# Altium PCB ScoreLED.PcbDoc (part 1 of 4)
Units mil, origin at the board's own origin, x right, y up, seen from the top; angles counter-clockwise.
Board outline 15000 x 7000 mil, 4 copper layers (Top Layer, Ground, Power, Bottom Layer); 605 components, 525 nets, 1780 pads, 554 vias.
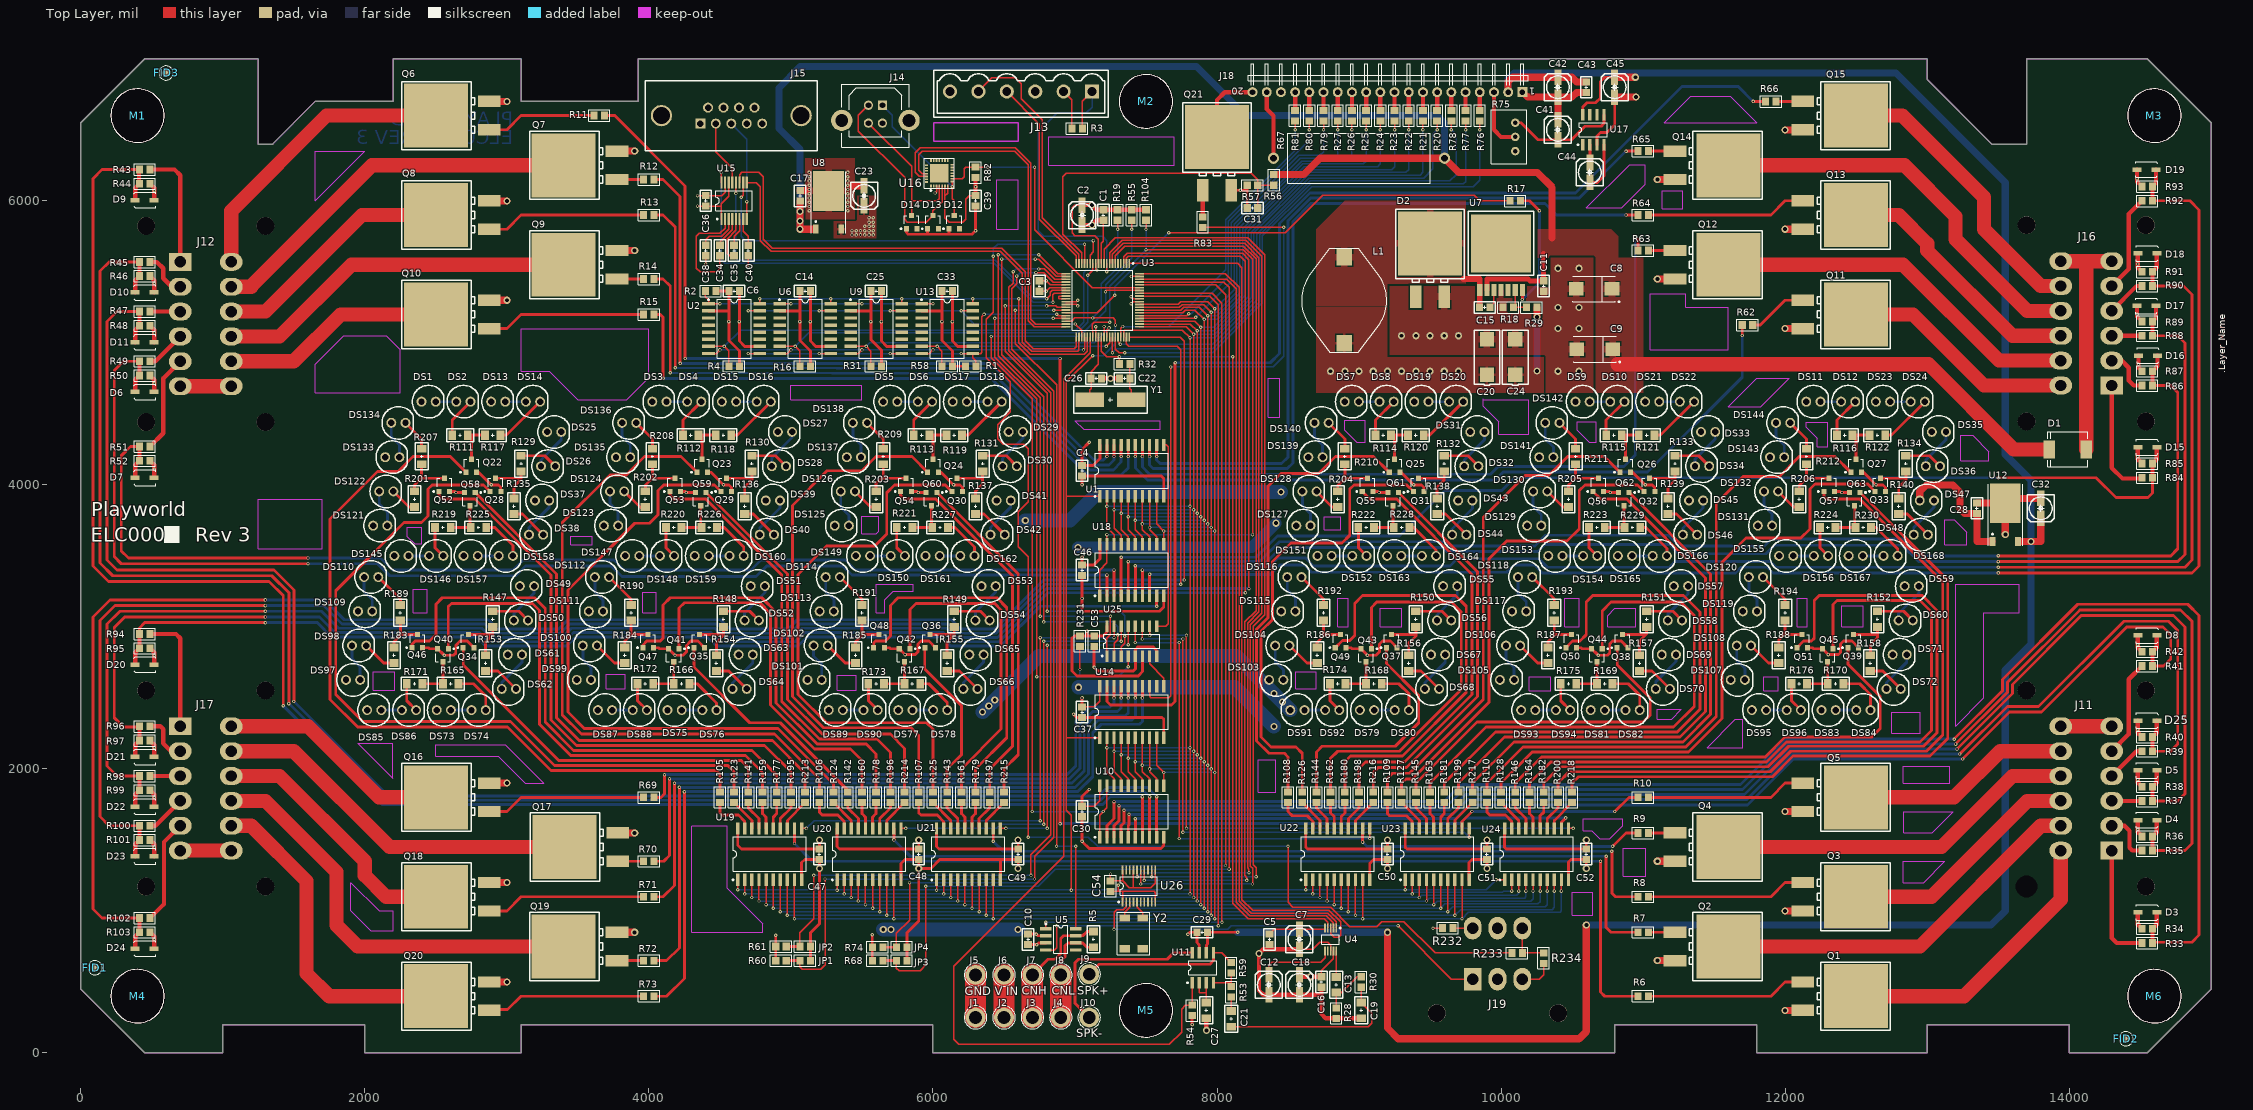
[diagram p0: Top Layer view]
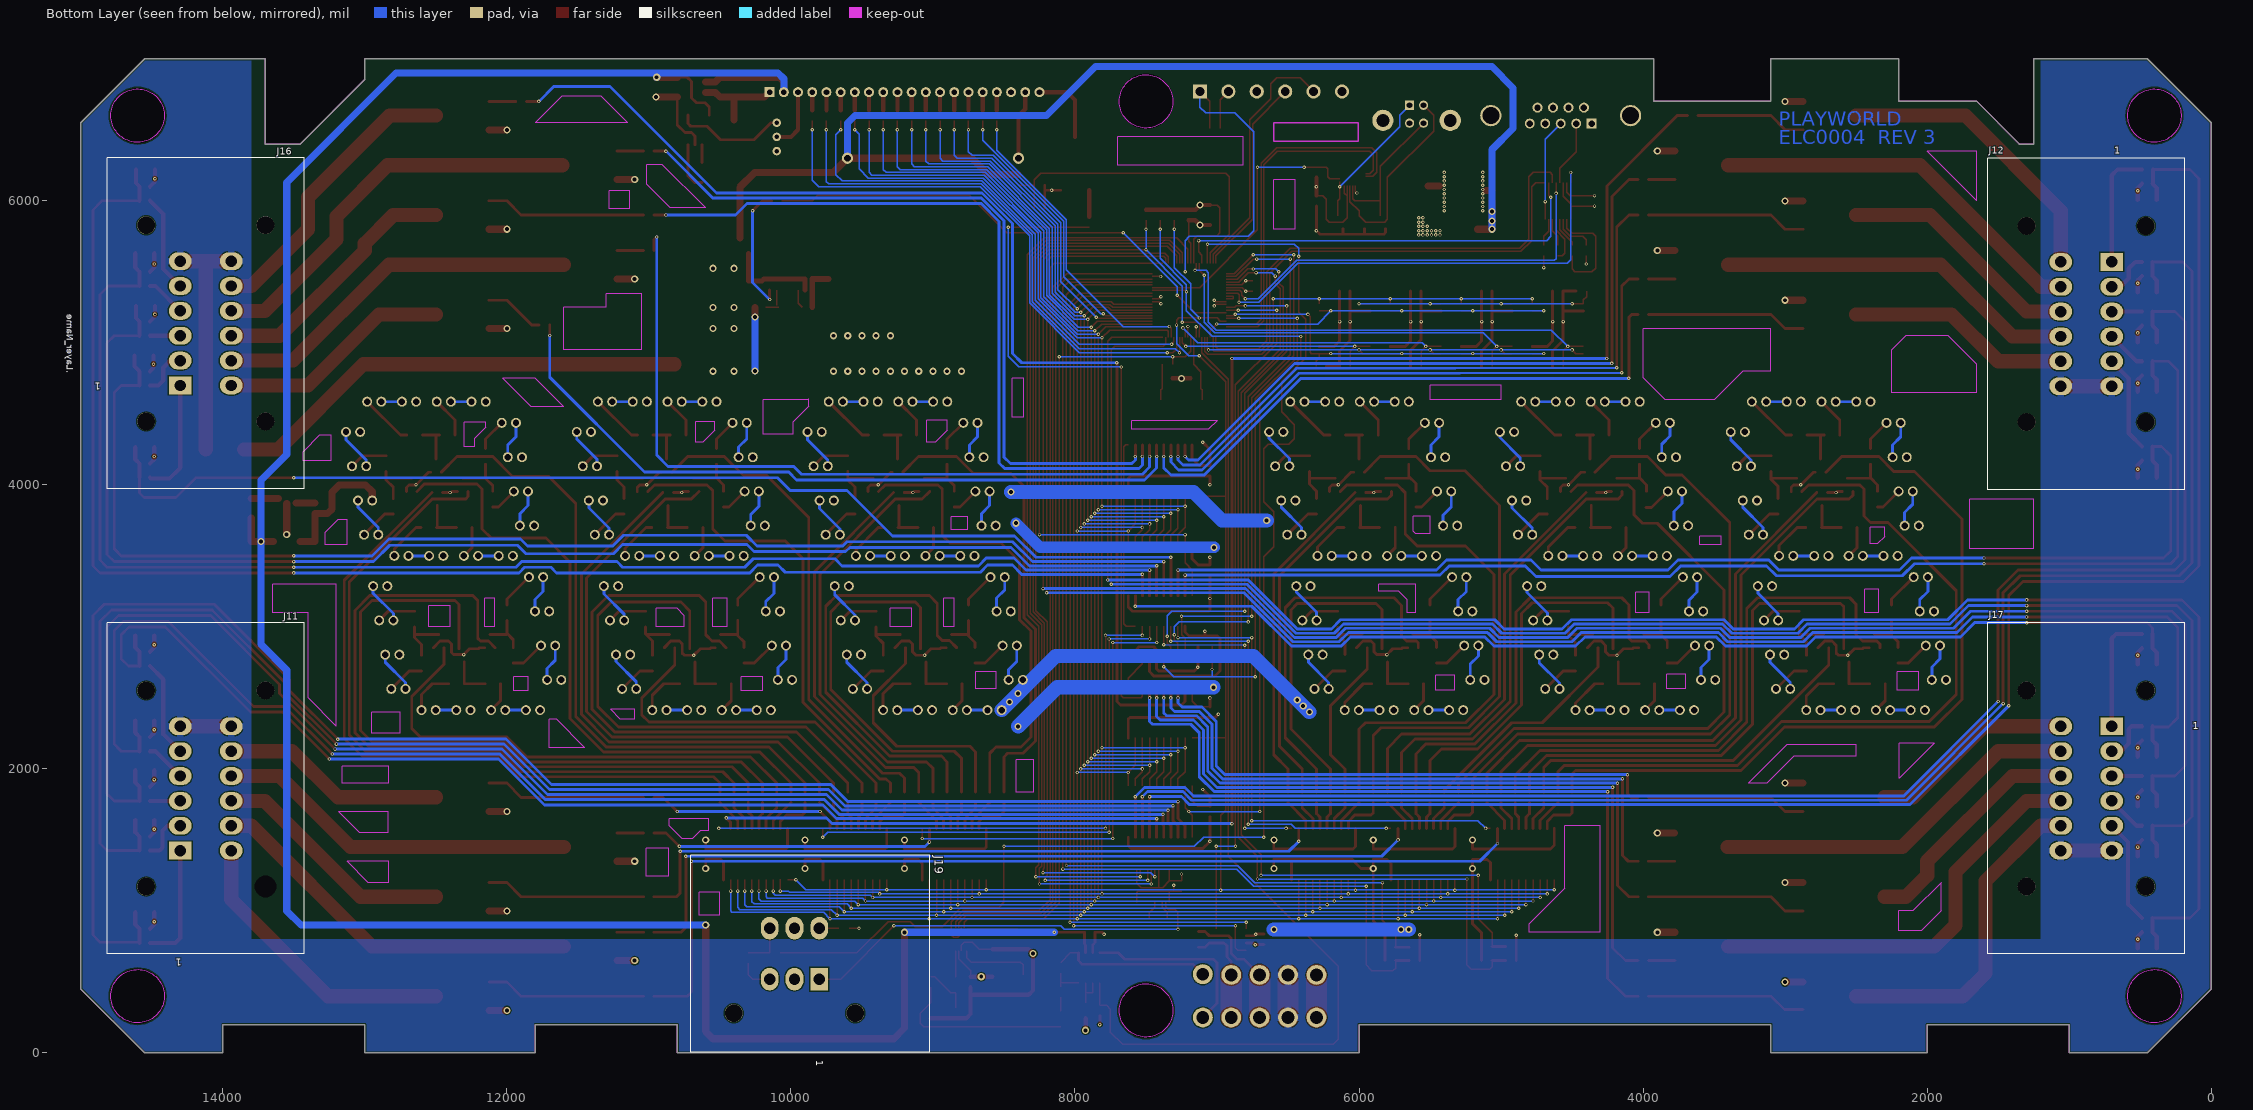
[diagram p1: Bottom Layer view, seen from below]
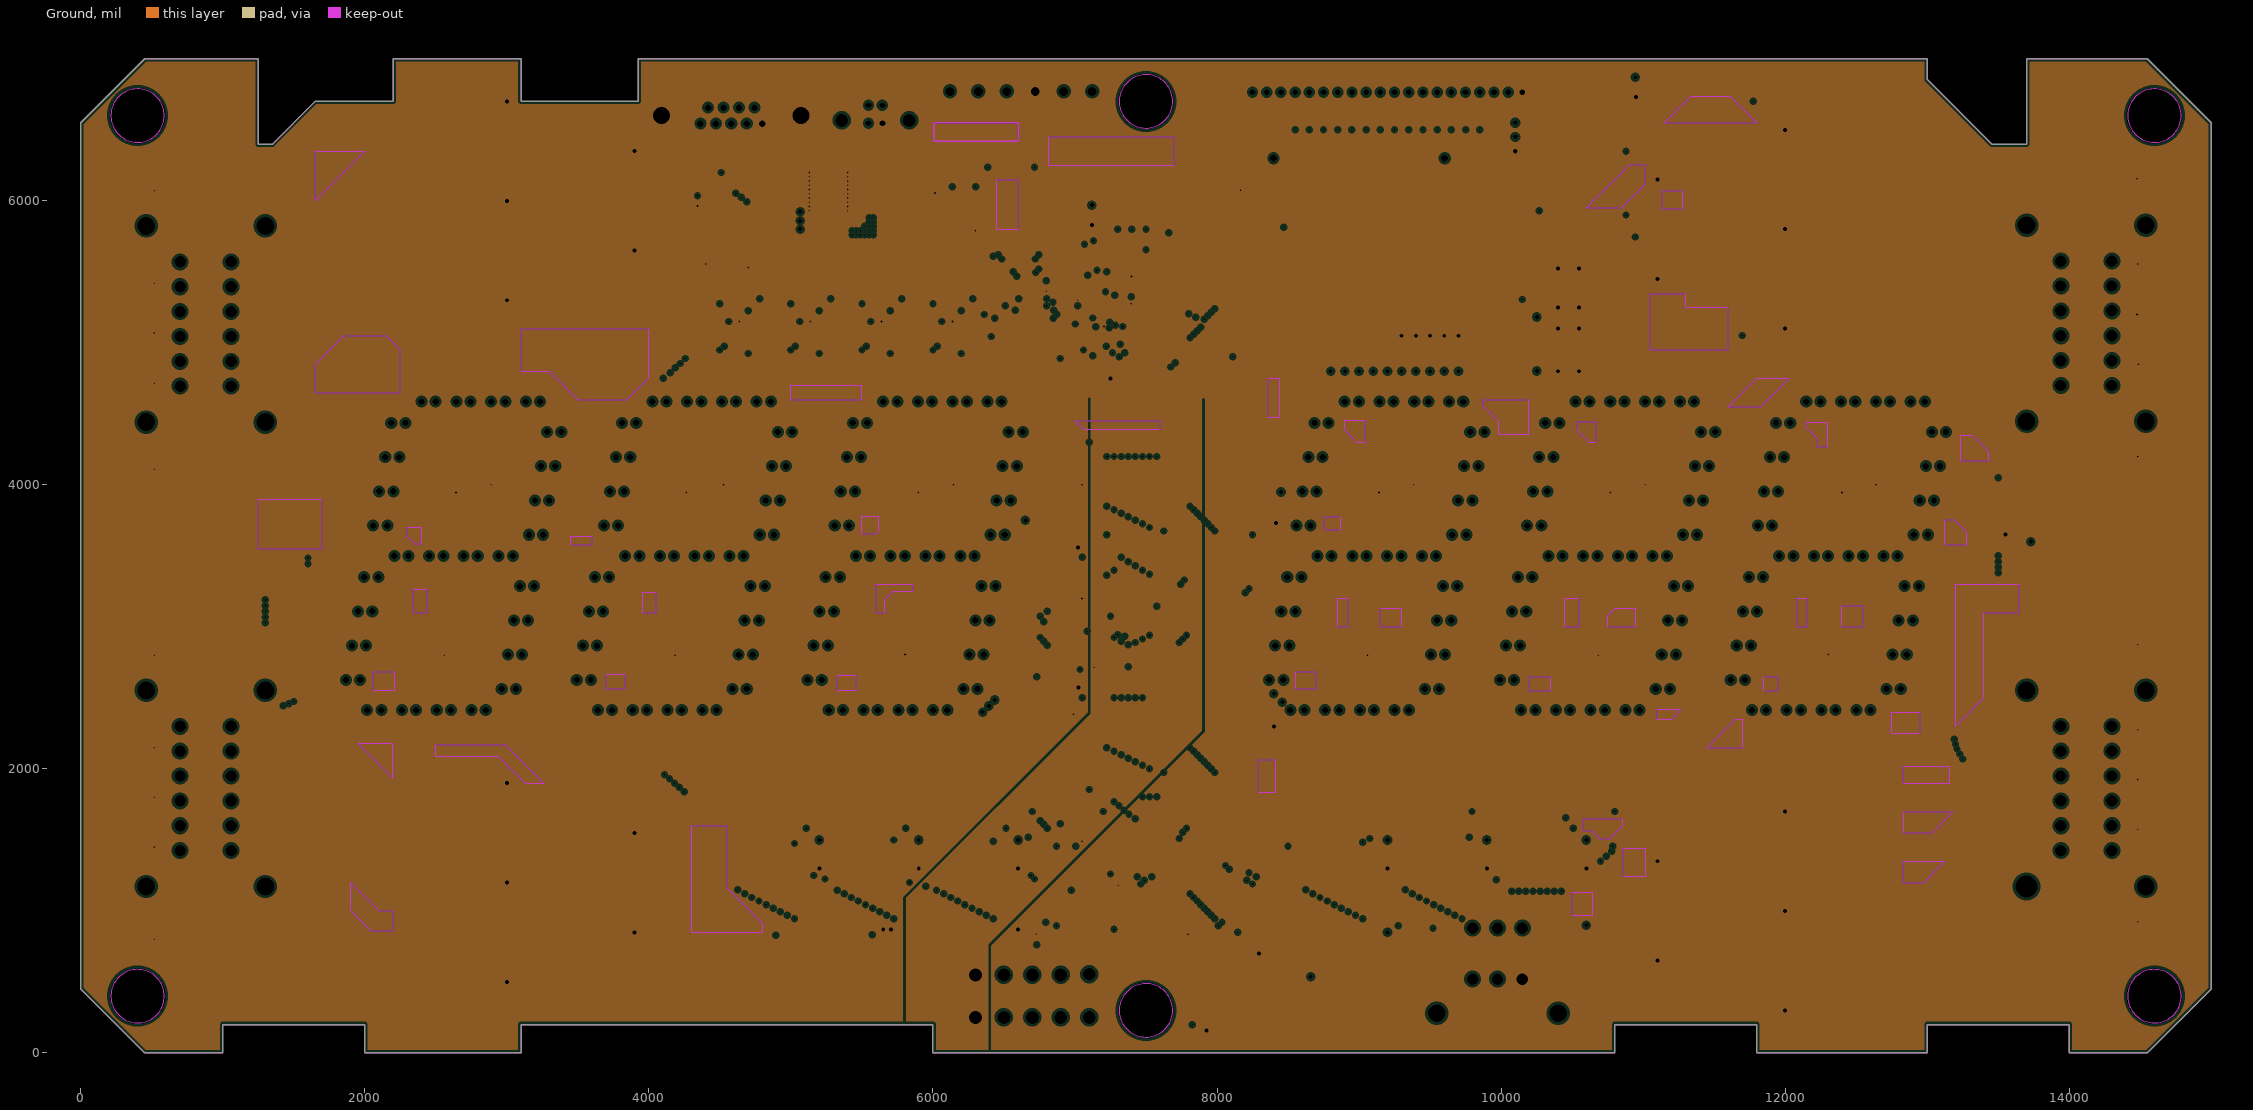
[diagram p2: Ground, clearances drawn from the general rule]
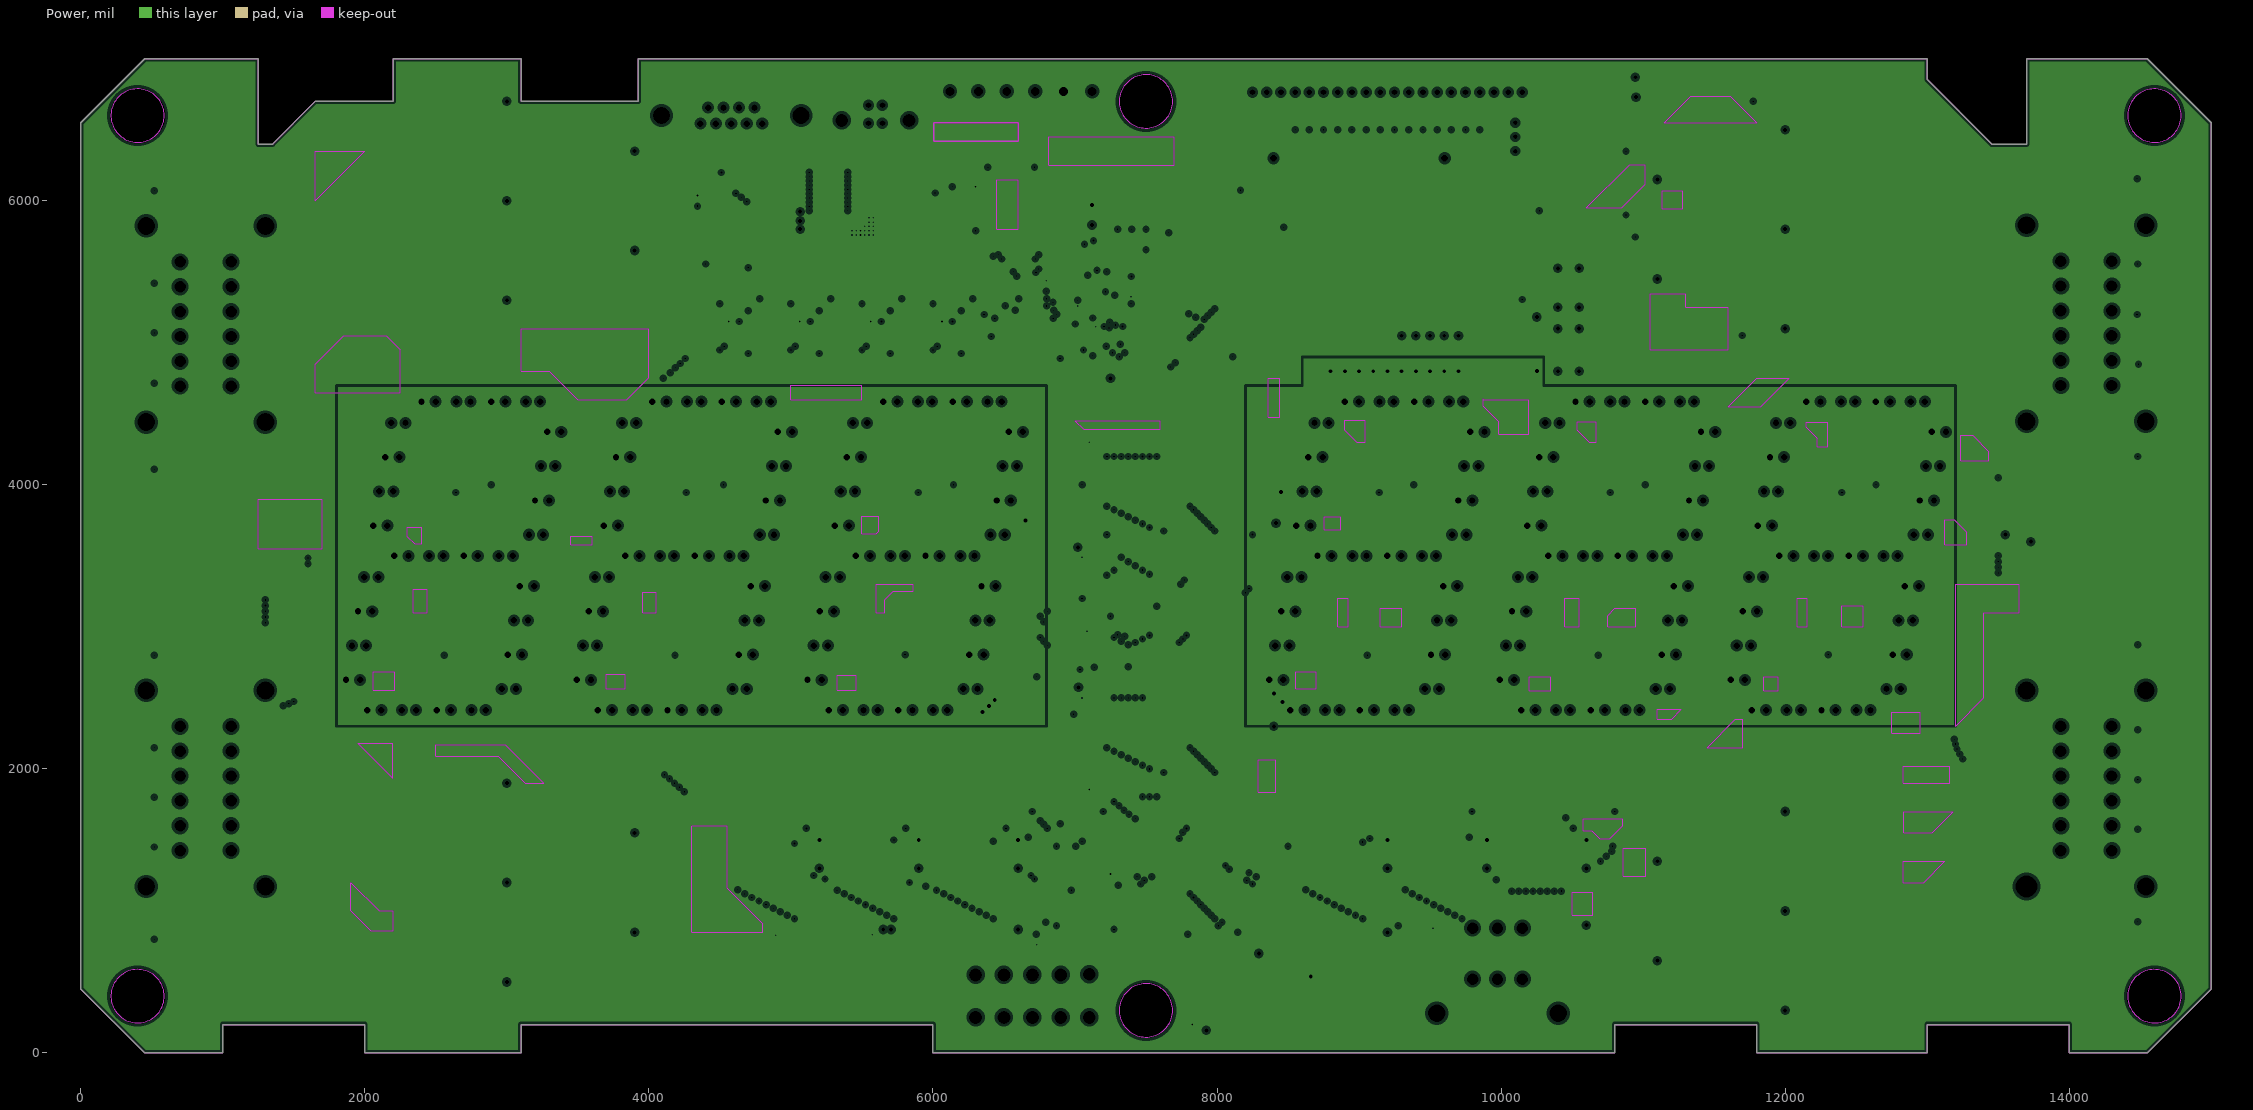
[diagram p3: Power, clearances drawn from the general rule]

## Layer stack, top to bottom
Top Layer: signal copper 1.4
Dielectric: core 12.6, FR-4, Dk 4.8
Ground: plane copper 1.4, net GND
Dielectric: prepreg 12.6, FR-4, Dk 4.8
Power: plane copper 1.4, net (Multiple Nets)
Dielectric: core 12.6, FR-4, Dk 4.8
Bottom Layer: signal copper 1.4

## Board outline
450,0 1000,0 1000,200 2000,200 2000,0 3100,0 3100,200 6000,200 6000,0 10800,0 10800,200 11800,200 11800,0 13000,0 13000,200 14000,200 14000,0 14550,0 15000,450 15000,6550 14550,7000 13700,7000 13700,6400 13455,6400 13000,6855 13000,7000 3925,7000 3925,6700 3100,6700 3100,7000 2200,7000 2200,6700 1650,6700 1350,6400 1250,6400 1250,7000 450,7000 0,6550 0,450

## Design rules (kind name [scope] priority, off if disabled: settings)
Clearance Clearance_Poly_Gnd [(InPolygon AND InNet('GND')) vs Not InNet('GND')] p1: gap=15
Clearance Clearance_MicroPads [(HasFootprint('TQFP-80')) Or (HasFootprint('TSSOP\10'))] p2: gap=5
Clearance [All] p3: gap=8
ComponentClearance ComponentClearance_LEDs [(HasFootprint('LED T1-3/4 FLUSH')) vs (HasFootprint('LED T1-3/4 FLUSH'))] p1: gap=0 collisioncheckmode=2 verticalgap=0
ComponentClearance [All] p2: gap=5 collisioncheckmode=2 verticalgap=10
Height [All] p1: minheight=0 maxheight=1200 prefheight=500
HoleSize HoleSize_DSUB [HasFootprint('DSUBV9')] p1: absolutevalues=TRUE maxlimit=120 minlimit=45 maxpercent=80.000 minpercent=20.000
HoleSize HoleSize_Deutsch [HasFootprint('JDT1512PA00Z') or HasFootprint('JDT1506PA00Z - 2 holes')] p2: absolutevalues=TRUE maxlimit=125 minlimit=80 maxpercent=80.000 minpercent=20.000
HoleSize HoleSize_Mount [HasFootprint('MHole250')] p3: absolutevalues=TRUE maxlimit=250 minlimit=100 maxpercent=80.000 minpercent=20.000
HoleSize [All] p4: absolutevalues=TRUE maxlimit=100 minlimit=0 maxpercent=80.000 minpercent=20.000
PlaneClearance PlaneClearance_Mounting [HasFootprint('MHole250')] p1: clearance=100
PlaneClearance [All] p2: clearance=20
PlaneConnect [All] p1: planeconnectstyle=Relief reliefexpansion=20 reliefentries=4 reliefconductorwidth=10 reliefairgap=10
PolygonConnect PolygonConnect_Vias [IsVia] p1: connectstyle=Direct reliefconductorwidth=50 reliefentries=4 polygonreliefangle="90 Angle"
PolygonConnect PolygonConnect_Vbat [InNet('VBAT') OR
InNet('NetC15_2') OR
InNet('+8 VCD') OR
InNet('GND') OR
InNet('Vin')] p2: connectstyle=Relief reliefconductorwidth=50 reliefentries=4 polygonreliefangle="90 Angle"
PolygonConnect [All] p3: connectstyle=Relief reliefconductorwidth=20 reliefentries=4 polygonreliefangle="90 Angle"
RoutingVias [All] p1: holewidth=28 width=50 viastyle="Through Hole" minholewidth=12 minwidth=24 maxholewidth=28 maxwidth=50
ShortCircuit Short_QFN28 [HasFootprintPad( 'QFN-P28','*')] p1: allowed=TRUE
ShortCircuit ShortCircuit_VDD_VCC [(InNet('VCC')) vs InNet('VDD')] p2: allowed=TRUE
ShortCircuit [All] p3: allowed=FALSE
SolderMaskExpansion [All] p1: expansion=4
TestPointUsage [All] p1: valid=0 allowmultiple=FALSE
Testpoint [All] p1: side=15 testpointundercomponent=TRUE minsize=40 maxsize=100 preferedsize=60 minholesize=0 maxholesize=40 preferedholesize=32 testpointgrid=1 style=1023 order=0123456789
Width Width_LAMP [InNetClass('Class_Lamp')] p1: maxlimit=150 minlimit=80 preferedwidth=100
Width Width_Can [(InNet('NetJ3_1') or InNet('NetJ4_1'))] p2: maxlimit=150 minlimit=10 preferedwidth=10
Width Width_Power [InNetClass('Class_Power')] p3: maxlimit=150 minlimit=10 preferedwidth=40
Width [All] p4: maxlimit=40 minlimit=10 preferedwidth=10 minimp=50.000000 maximp=50.000000 favimp=50.000000
13 further rules are at their usual default settings.

## Classes and differential pairs
net class Class_Power: "+3.3 VDC" "+5 VDC" "+8 VDC" GND VBAT VIN
net class Class_Lamp: NetJ11_8 NetJ11_9 NetJ11_10 NetJ11_11 NetJ11_12 NetJ12_8 NetJ12_9 NetJ12_10 NetJ12_11 NetJ12_12 NetJ16_8 NetJ16_9 NetJ16_10 NetJ16_11 NetJ16_12 NetJ17_8 NetJ17_9 NetJ17_10 NetJ17_11 NetJ17_12 VBAT

## Components (designator, comment, footprint, x,y, rotation, side; value= is the part's Value field where it differs from the comment)
C1 "0.1 uF 50 V" C0805 7200,5900 r270 top
C2 "10uF 16V" C4X5.8 7050,5900 r0 top
C3 "0.1 uF 50 V" C0805 6750,5400 r270 top
C4 "0.1 uF 50 V" C0805 7050,4100 r270 top
C5 "0.1 uF 50 V" C0805 8370,800 r270 top
C6 "0.1 uF 50 V" C0805 4600,5365 r0 top
C7 "10uF 16V" C4X5.8 8580,800 r0 top
C8 "47uF 35V" "C EIA7343-43 (X)" 10655,5380 r180 top
C9 "47uF 35V" "C EIA7343-43 (X)" 10660,4955 r180 top
C10 "0.1 uF 50 V" C0805 6670,800 r90 top
C11 "0.1 uF 50 V" C0805 10300,5400 r270 top
C12 "10uF 16V" C4X5.8 8365,480 r0 top
C13 "1uF 25V" R1206 8840,480 r270 top
C14 "0.1 uF 50 V" C0805 5100,5365 r0 top
C15 "CS/C0805C103K5RAC" C0805 9885,5250 r180 top
C16 "0.1 uF 50 V" C0805 8735,500 r270 top
C17 "0.1 uF 50 V" C0805 5065,6035 r90 top
C18 "10uF 16V" C4X5.8 8580,480 r0 top
C19 "1uF 25V" R1206 9015,300 r270 top
C20 "68uF 16V" C7343 9900,4900 r90 top
C21 ".33uF 25V" R1206 8100,240 r90 top
C22 "18pF" C0805 7350,4750 r180 top
C23 "10uF 16V" C4X5.8 5515,6035 r180 top
C24 "68uF 16V" C7343 10100,4900 r90 top
C25 "0.1 uF 50 V" C0805 5600,5365 r0 top
C26 "18pF" C0805 7150,4750 r0 top
C27 "1uF 25V" R1206 7925,300 r270 top
C28 "0.1 uF 50 V" C0805 13350,3835 r90 top
C29 "0.1 uF 50 V" C0805 7895,850 r180 top
C30 "0.1 uF 50 V" C0805 7050,1700 r270 top
C31 "0.1 uF 50 V" C0805 8250,5950 r180 top
C32 "10uF 16V" C4X5.8 13800,3835 r180 top
C33 "0.1 uF 50 V" C0805 6100,5365 r0 top
C34 "0.1 uF 50 V" C0805 4500,5650 r90 top
C35 "0.1 uF 50 V" C0805 4600,5650 r90 top
C36 "0.1 uF 50 V" C0805 4400,6000 r270 top
C37 "0.1 uF 50 V" C0805 7050,2400 r270 top
C38 "0.1 uF 50 V" C0805 4400,5650 r270 top
C39 "0.1 uF 50 V" C0805 6300,6000 r270 top
C40 "0.1 uF 50 V" C0805 4700,5650 r270 top
C41 "10uF 16V" C4X5.8 10400,6500 r0 top
C42 "10uF 16V" C4X5.8 10400,6800 r0 top
C43 "0.1 uF 50 V" C0805 10600,6800 r270 top
C44 "10uF 16V" C4X5.8 10625,6200 r0 top
C45 "10uF 16V" C4X5.8 10800,6800 r0 top
C46 "0.1 uF 50 V" C0805 7050,3400 r270 top
C47 "0.1 uF 50 V" C0805 5200,1400 r270 top
C48 "0.1 uF 50 V" C0805 5900,1400 r270 top
C49 "0.1 uF 50 V" C0805 6600,1400 r270 top
C50 "0.1 uF 50 V" C0805 9200,1400 r270 top
C51 "0.1 uF 50 V" C0805 9900,1400 r270 top
C52 "0.1 uF 50 V" C0805 10600,1400 r270 top
C53 "0.1 uF 50 V" C0805 7135,2900 r270 top
C54 "0.1 uF 50 V" C0805 7250,1175 r270 top
D1 "3A 600V SMC" DIODE_SMC 13990,4250 r180 top
D2 "8A 80V" D2PAK 9500,5700 r0 top
D3 "3.0V 500mW" SOD123 14550,990 r0 top
D4 "3.0V 500mW" SOD123 14550,1640 r0 top
D5 "3.0V 500mW" SOD123 14550,1990 r0 top
D6 "3.0V 500mW" SOD123 450,4655 r180 top
D7 "3.0V 500mW" SOD123 450,4050 r180 top
D8 "3.0V 500mW" SOD123 14550,2940 r0 top
D9 "3.0V 500mW" SOD123 450,6005 r180 top
D10 "3.0V 500mW" SOD123 450,5355 r180 top
D11 "3.0V 500mW" SOD123 450,5005 r180 top
D12 "BAS16" SOT23 6150,5850 r0 top
D13 "BAS16" SOT23 6000,5850 r0 top
D14 "BAS16" SOT23 5850,5850 r0 top
D15 "3.0V 500mW" SOD123 14550,4265 r0 top
D16 "3.0V 500mW" SOD123 14555,4910 r0 top
D17 "3.0V 500mW" SOD123 14545,5260 r0 top
D18 "3.0V 500mW" SOD123 14550,5630 r0 top
D19 "3.0V 500mW" SOD123 14545,6220 r0 top
D20 "3.0V 500mW" SOD123 450,2735 r180 top
D21 "3.0V 500mW" SOD123 450,2085 r180 top
D22 "3.0V 500mW" SOD123 450,1735 r180 top
D23 "3.0V 500mW" SOD123 450,1385 r180 top
D24 "3.0V 500mW" SOD123 450,735 r180 top
D25 "3.0V 500mW" SOD123 14550,2340 r0 top
DS1 "RED T1-3/4" "LED T1-3/4 Flush" 2398.9,4585.8 r0 top locked
DS2 "RED T1-3/4" "LED T1-3/4 Flush" 2643.9,4585.8 r0 top locked
DS3 "RED T1-3/4" "LED T1-3/4 Flush" 4023.9,4585.8 r0 top locked
DS4 "RED T1-3/4" "LED T1-3/4 Flush" 4268.9,4585.8 r0 top locked
DS5 "RED T1-3/4" "LED T1-3/4 Flush" 5648.9,4585.8 r0 top locked
DS6 "RED T1-3/4" "LED T1-3/4 Flush" 5893.9,4585.8 r0 top locked
DS7 "GREEN T1-3/4" "LED T1-3/4 Flush" 8898.9,4585.8 r0 top locked
DS8 "GREEN T1-3/4" "LED T1-3/4 Flush" 9143.9,4585.8 r0 top locked
DS9 "GREEN T1-3/4" "LED T1-3/4 Flush" 10523.9,4585.8 r0 top locked
DS10 "GREEN T1-3/4" "LED T1-3/4 Flush" 10768.9,4585.8 r0 top locked
DS11 "GREEN T1-3/4" "LED T1-3/4 Flush" 12148.9,4585.8 r0 top locked
DS12 "GREEN T1-3/4" "LED T1-3/4 Flush" 12393.9,4585.8 r0 top locked
DS13 "RED T1-3/4" "LED T1-3/4 Flush" 2888.9,4585.8 r0 top locked
DS14 "RED T1-3/4" "LED T1-3/4 Flush" 3133.9,4585.8 r0 top locked
DS15 "RED T1-3/4" "LED T1-3/4 Flush" 4513.9,4585.8 r0 top locked
DS16 "RED T1-3/4" "LED T1-3/4 Flush" 4758.9,4585.8 r0 top locked
DS17 "RED T1-3/4" "LED T1-3/4 Flush" 6138.9,4585.8 r0 top locked
DS18 "RED T1-3/4" "LED T1-3/4 Flush" 6383.9,4585.8 r0 top locked
DS19 "GREEN T1-3/4" "LED T1-3/4 Flush" 9388.9,4585.8 r0 top locked
DS20 "GREEN T1-3/4" "LED T1-3/4 Flush" 9633.9,4585.8 r0 top locked
DS21 "GREEN T1-3/4" "LED T1-3/4 Flush" 11013.9,4585.8 r0 top locked
DS22 "GREEN T1-3/4" "LED T1-3/4 Flush" 11258.9,4585.8 r0 top locked
DS23 "GREEN T1-3/4" "LED T1-3/4 Flush" 12638.9,4585.8 r0 top locked
DS24 "GREEN T1-3/4" "LED T1-3/4 Flush" 12883.9,4585.8 r0 top locked
DS25 "RED T1-3/4" "LED T1-3/4 Flush" 3283,4372.9 r0 top locked
DS26 "RED T1-3/4" "LED T1-3/4 Flush" 3240.5,4131.6 r0 top locked
DS27 "RED T1-3/4" "LED T1-3/4 Flush" 4908,4372.9 r0 top locked
DS28 "RED T1-3/4" "LED T1-3/4 Flush" 4865.5,4131.6 r0 top locked
DS29 "RED T1-3/4" "LED T1-3/4 Flush" 6533,4372.9 r0 top locked
DS30 "RED T1-3/4" "LED T1-3/4 Flush" 6490.5,4131.6 r0 top locked
DS31 "GREEN T1-3/4" "LED T1-3/4 Flush" 9783,4372.9 r0 top locked
DS32 "GREEN T1-3/4" "LED T1-3/4 Flush" 9740.5,4131.6 r0 top locked
DS33 "GREEN T1-3/4" "LED T1-3/4 Flush" 11408,4372.9 r0 top locked
DS34 "GREEN T1-3/4" "LED T1-3/4 Flush" 11365.5,4131.6 r0 top locked
DS35 "GREEN T1-3/4" "LED T1-3/4 Flush" 13033,4372.9 r0 top locked
DS36 "GREEN T1-3/4" "LED T1-3/4 Flush" 12990.5,4131.6 r0 top locked
DS37 "RED T1-3/4" "LED T1-3/4 Flush" 3197.9,3890.3 r0 top locked
DS38 "RED T1-3/4" "LED T1-3/4 Flush" 3155.4,3649.1 r0 top locked
DS39 "RED T1-3/4" "LED T1-3/4 Flush" 4822.9,3890.3 r0 top locked
DS40 "RED T1-3/4" "LED T1-3/4 Flush" 4780.4,3649.1 r0 top locked
DS41 "RED T1-3/4" "LED T1-3/4 Flush" 6447.9,3890.3 r0 top locked
DS42 "RED T1-3/4" "LED T1-3/4 Flush" 6405.4,3649.1 r0 top locked
DS43 "GREEN T1-3/4" "LED T1-3/4 Flush" 9697.9,3890.3 r0 top locked
DS44 "GREEN T1-3/4" "LED T1-3/4 Flush" 9655.4,3649.1 r0 top locked
DS45 "GREEN T1-3/4" "LED T1-3/4 Flush" 11322.9,3890.3 r0 top locked
DS46 "GREEN T1-3/4" "LED T1-3/4 Flush" 11280.4,3649.1 r0 top locked
DS47 "GREEN T1-3/4" "LED T1-3/4 Flush" 12947.9,3890.3 r0 top locked
DS48 "GREEN T1-3/4" "LED T1-3/4 Flush" 12905.4,3649.1 r0 top locked
DS49 "RED T1-3/4" "LED T1-3/4 Flush" 3091.6,3287.1 r0 top locked
DS50 "RED T1-3/4" "LED T1-3/4 Flush" 3049,3045.9 r0 top locked
DS51 "RED T1-3/4" "LED T1-3/4 Flush" 4716.6,3287.1 r0 top locked
DS52 "RED T1-3/4" "LED T1-3/4 Flush" 4674,3045.9 r0 top locked
DS53 "RED T1-3/4" "LED T1-3/4 Flush" 6341.6,3287.1 r0 top locked
DS54 "RED T1-3/4" "LED T1-3/4 Flush" 6299,3045.9 r0 top locked
DS55 "GREEN T1-3/4" "LED T1-3/4 Flush" 9591.6,3287.1 r0 top locked
DS56 "GREEN T1-3/4" "LED T1-3/4 Flush" 9549,3045.9 r0 top locked
DS57 "GREEN T1-3/4" "LED T1-3/4 Flush" 11216.6,3287.1 r0 top locked
DS58 "GREEN T1-3/4" "LED T1-3/4 Flush" 11174,3045.9 r0 top locked
DS59 "GREEN T1-3/4" "LED T1-3/4 Flush" 12841.6,3287.1 r0 top locked
DS60 "GREEN T1-3/4" "LED T1-3/4 Flush" 12799,3045.9 r0 top locked
DS61 "RED T1-3/4" "LED T1-3/4 Flush" 3006.5,2804.6 r0 top locked
DS62 "RED T1-3/4" "LED T1-3/4 Flush" 2963.9,2563.3 r0 top locked
DS63 "RED T1-3/4" "LED T1-3/4 Flush" 4631.5,2804.6 r0 top locked
DS64 "RED T1-3/4" "LED T1-3/4 Flush" 4588.9,2563.3 r0 top locked
DS65 "RED T1-3/4" "LED T1-3/4 Flush" 6256.5,2804.6 r0 top locked
DS66 "RED T1-3/4" "LED T1-3/4 Flush" 6213.9,2563.3 r0 top locked
DS67 "GREEN T1-3/4" "LED T1-3/4 Flush" 9506.5,2804.6 r0 top locked
DS68 "GREEN T1-3/4" "LED T1-3/4 Flush" 9463.9,2563.3 r0 top locked
DS69 "GREEN T1-3/4" "LED T1-3/4 Flush" 11131.5,2804.6 r0 top locked
DS70 "GREEN T1-3/4" "LED T1-3/4 Flush" 11088.9,2563.3 r0 top locked
DS71 "GREEN T1-3/4" "LED T1-3/4 Flush" 12756.5,2804.6 r0 top locked
DS72 "GREEN T1-3/4" "LED T1-3/4 Flush" 12713.9,2563.3 r0 top locked
DS73 "RED T1-3/4" "LED T1-3/4 Flush" 2506.1,2414.2 r0 top locked
DS74 "RED T1-3/4" "LED T1-3/4 Flush" 2751.1,2414.2 r0 top locked
DS75 "RED T1-3/4" "LED T1-3/4 Flush" 4131.1,2414.2 r0 top locked
DS76 "RED T1-3/4" "LED T1-3/4 Flush" 4376.1,2414.2 r0 top locked
DS77 "RED T1-3/4" "LED T1-3/4 Flush" 5756.1,2414.2 r0 top locked
DS78 "RED T1-3/4" "LED T1-3/4 Flush" 6001.1,2414.2 r0 top locked
DS79 "GREEN T1-3/4" "LED T1-3/4 Flush" 9006.1,2414.2 r0 top locked
DS80 "GREEN T1-3/4" "LED T1-3/4 Flush" 9251.1,2414.2 r0 top locked
DS81 "GREEN T1-3/4" "LED T1-3/4 Flush" 10631.1,2414.2 r0 top locked
DS82 "GREEN T1-3/4" "LED T1-3/4 Flush" 10876.1,2414.2 r0 top locked
DS83 "GREEN T1-3/4" "LED T1-3/4 Flush" 12256.1,2414.2 r0 top locked
DS84 "GREEN T1-3/4" "LED T1-3/4 Flush" 12501.1,2414.2 r0 top locked
DS85 "RED T1-3/4" "LED T1-3/4 Flush" 2016.1,2414.2 r0 top locked
DS86 "RED T1-3/4" "LED T1-3/4 Flush" 2261.1,2414.2 r0 top locked
DS87 "RED T1-3/4" "LED T1-3/4 Flush" 3641.1,2414.2 r0 top locked
DS88 "RED T1-3/4" "LED T1-3/4 Flush" 3886.1,2414.2 r0 top locked
DS89 "RED T1-3/4" "LED T1-3/4 Flush" 5266.1,2414.2 r0 top locked
DS90 "RED T1-3/4" "LED T1-3/4 Flush" 5511.1,2414.2 r0 top locked
DS91 "GREEN T1-3/4" "LED T1-3/4 Flush" 8516.1,2414.2 r0 top locked
DS92 "GREEN T1-3/4" "LED T1-3/4 Flush" 8761.1,2414.2 r0 top locked
DS93 "GREEN T1-3/4" "LED T1-3/4 Flush" 10141.1,2414.2 r0 top locked
DS94 "GREEN T1-3/4" "LED T1-3/4 Flush" 10386.1,2414.2 r0 top locked
DS95 "GREEN T1-3/4" "LED T1-3/4 Flush" 11766.1,2414.2 r0 top locked
DS96 "GREEN T1-3/4" "LED T1-3/4 Flush" 12011.1,2414.2 r0 top locked
DS97 "RED T1-3/4" "LED T1-3/4 Flush" 1867,2627.1 r0 top locked
DS98 "RED T1-3/4" "LED T1-3/4 Flush" 1909.5,2868.4 r0 top locked
DS99 "RED T1-3/4" "LED T1-3/4 Flush" 3492,2627.1 r0 top locked
DS100 "RED T1-3/4" "LED T1-3/4 Flush" 3534.5,2868.4 r0 top locked
DS101 "RED T1-3/4" "LED T1-3/4 Flush" 5117,2627.1 r0 top locked
DS102 "RED T1-3/4" "LED T1-3/4 Flush" 5159.5,2868.4 r0 top locked
DS103 "GREEN T1-3/4" "LED T1-3/4 Flush" 8367,2627.1 r0 top locked
DS104 "GREEN T1-3/4" "LED T1-3/4 Flush" 8409.5,2868.4 r0 top locked
DS105 "GREEN T1-3/4" "LED T1-3/4 Flush" 9992,2627.1 r0 top locked
DS106 "GREEN T1-3/4" "LED T1-3/4 Flush" 10034.5,2868.4 r0 top locked
DS107 "GREEN T1-3/4" "LED T1-3/4 Flush" 11617,2627.1 r0 top locked
DS108 "GREEN T1-3/4" "LED T1-3/4 Flush" 11659.5,2868.4 r0 top locked
DS109 "RED T1-3/4" "LED T1-3/4 Flush" 1952.1,3109.7 r0 top locked
DS110 "RED T1-3/4" "LED T1-3/4 Flush" 1994.6,3350.9 r0 top locked
DS111 "RED T1-3/4" "LED T1-3/4 Flush" 3577.1,3109.7 r0 top locked
DS112 "RED T1-3/4" "LED T1-3/4 Flush" 3619.6,3350.9 r0 top locked
DS113 "RED T1-3/4" "LED T1-3/4 Flush" 5202.1,3109.7 r0 top locked
DS114 "RED T1-3/4" "LED T1-3/4 Flush" 5244.6,3350.9 r0 top locked
DS115 "GREEN T1-3/4" "LED T1-3/4 Flush" 8452.1,3109.7 r0 top locked
DS116 "GREEN T1-3/4" "LED T1-3/4 Flush" 8494.6,3350.9 r0 top locked
DS117 "GREEN T1-3/4" "LED T1-3/4 Flush" 10077.1,3109.7 r0 top locked
DS118 "GREEN T1-3/4" "LED T1-3/4 Flush" 10119.6,3350.9 r0 top locked
DS119 "GREEN T1-3/4" "LED T1-3/4 Flush" 11702.1,3109.7 r0 top locked
DS120 "GREEN T1-3/4" "LED T1-3/4 Flush" 11744.6,3350.9 r0 top locked
DS121 "RED T1-3/4" "LED T1-3/4 Flush" 2058.4,3712.9 r0 top locked
DS122 "RED T1-3/4" "LED T1-3/4 Flush" 2101,3954.1 r0 top locked
DS123 "RED T1-3/4" "LED T1-3/4 Flush" 3683.4,3712.9 r0 top locked
DS124 "RED T1-3/4" "LED T1-3/4 Flush" 3726,3954.1 r0 top locked
DS125 "RED T1-3/4" "LED T1-3/4 Flush" 5308.4,3712.9 r0 top locked
DS126 "RED T1-3/4" "LED T1-3/4 Flush" 5351,3954.1 r0 top locked
DS127 "GREEN T1-3/4" "LED T1-3/4 Flush" 8558.4,3712.9 r0 top locked
DS128 "GREEN T1-3/4" "LED T1-3/4 Flush" 8601,3954.1 r0 top locked
DS129 "GREEN T1-3/4" "LED T1-3/4 Flush" 10183.4,3712.9 r0 top locked
DS130 "GREEN T1-3/4" "LED T1-3/4 Flush" 10226,3954.1 r0 top locked
DS131 "GREEN T1-3/4" "LED T1-3/4 Flush" 11808.4,3712.9 r0 top locked
DS132 "GREEN T1-3/4" "LED T1-3/4 Flush" 11851,3954.1 r0 top locked
DS133 "RED T1-3/4" "LED T1-3/4 Flush" 2143.5,4195 r0 top locked
DS134 "RED T1-3/4" "LED T1-3/4 Flush" 2186.1,4436.7 r0 top locked
DS135 "RED T1-3/4" "LED T1-3/4 Flush" 3768.5,4195 r0 top locked
DS136 "RED T1-3/4" "LED T1-3/4 Flush" 3811.1,4436.7 r0 top locked
DS137 "RED T1-3/4" "LED T1-3/4 Flush" 5393.5,4195 r0 top locked
DS138 "RED T1-3/4" "LED T1-3/4 Flush" 5436.1,4436.7 r0 top locked
DS139 "GREEN T1-3/4" "LED T1-3/4 Flush" 8643.5,4195 r0 top locked
DS140 "GREEN T1-3/4" "LED T1-3/4 Flush" 8686.1,4436.7 r0 top locked
DS141 "GREEN T1-3/4" "LED T1-3/4 Flush" 10268.5,4195 r0 top locked
DS142 "GREEN T1-3/4" "LED T1-3/4 Flush" 10311.1,4436.7 r0 top locked
DS143 "GREEN T1-3/4" "LED T1-3/4 Flush" 11893.5,4195 r0 top locked
DS144 "GREEN T1-3/4" "LED T1-3/4 Flush" 11936.1,4436.7 r0 top locked
DS145 "RED T1-3/4" "LED T1-3/4 Flush" 2207.5,3500 r0 top locked
DS146 "RED T1-3/4" "LED T1-3/4 Flush" 2452.5,3500 r0 top locked
DS147 "RED T1-3/4" "LED T1-3/4 Flush" 3832.5,3500 r0 top locked
DS148 "RED T1-3/4" "LED T1-3/4 Flush" 4077.5,3500 r0 top locked
DS149 "RED T1-3/4" "LED T1-3/4 Flush" 5457.5,3500 r0 top locked
DS150 "RED T1-3/4" "LED T1-3/4 Flush" 5702.5,3500 r0 top locked
DS151 "GREEN T1-3/4" "LED T1-3/4 Flush" 8707.5,3500 r0 top locked
DS152 "GREEN T1-3/4" "LED T1-3/4 Flush" 8952.5,3500 r0 top locked
DS153 "GREEN T1-3/4" "LED T1-3/4 Flush" 10332.5,3500 r0 top locked
DS154 "GREEN T1-3/4" "LED T1-3/4 Flush" 10577.5,3500 r0 top locked
DS155 "GREEN T1-3/4" "LED T1-3/4 Flush" 11957.5,3500 r0 top locked
DS156 "GREEN T1-3/4" "LED T1-3/4 Flush" 12202.5,3500 r0 top locked
DS157 "RED T1-3/4" "LED T1-3/4 Flush" 2695,3500 r0 top locked
DS158 "RED T1-3/4" "LED T1-3/4 Flush" 2942.5,3500 r0 top locked
DS159 "RED T1-3/4" "LED T1-3/4 Flush" 4322.5,3500 r0 top locked
DS160 "RED T1-3/4" "LED T1-3/4 Flush" 4567.5,3500 r0 top locked
DS161 "RED T1-3/4" "LED T1-3/4 Flush" 5947.5,3500 r0 top locked
DS162 "RED T1-3/4" "LED T1-3/4 Flush" 6192.5,3500 r0 top locked
DS163 "GREEN T1-3/4" "LED T1-3/4 Flush" 9197.5,3500 r0 top locked
DS164 "GREEN T1-3/4" "LED T1-3/4 Flush" 9442.5,3500 r0 top locked
DS165 "GREEN T1-3/4" "LED T1-3/4 Flush" 10822.5,3500 r0 top locked
DS166 "GREEN T1-3/4" "LED T1-3/4 Flush" 11067.5,3500 r0 top locked
DS167 "GREEN T1-3/4" "LED T1-3/4 Flush" 12447.5,3500 r0 top locked
DS168 "GREEN T1-3/4" "LED T1-3/4 Flush" 12692.5,3500 r0 top locked
FID1 "Fiducial" FIDUCIAL#1 100,600 r90 top locked
FID2 "Fiducial" FIDUCIAL#2 14400,100 r90 top locked
FID3 "Fiducial" FIDUCIAL#2 600,6900 r90 top locked
J1 "~14GA_WIRE" WIRE_14GA 6300,250 r0 top
J2 "~14GA_WIRE" WIRE_14GA 6500,250 r0 top
J3 "~14GA_WIRE" WIRE_14GA 6700,250 r0 top
J4 "~14GA_WIRE" WIRE_14GA 6900,250 r0 top
J5 "~14GA_WIRE" WIRE_14GA 6300,550 r0 top
J6 "~14GA_WIRE" WIRE_14GA 6500,550 r0 top
J7 "~14GA_WIRE" WIRE_14GA 6700,550 r0 top
J8 "~14GA_WIRE" WIRE_14GA 6900,550 r0 top
J9 "~14GA_WIRE" WIRE_14GA 7100,555 r0 top
J10 "~14GA_WIRE" WIRE_14GA 7100,250 r0 top
J11 "JDT1512PA00Z" JDT1512PA00Z#1 14300,1425 r0 bottom locked
J12 "JDT1512PA00Z" JDT1512PA00Z#2 700,5570 r180 bottom locked
J13 "CPM5.08/6VE" JCPM5086VE0Z 7120,6770 r180 top
J14 "787834-2" KUSBVX-BS1N 5595,6600 r0 top
J15 "DE-9S" DSUBV9 4580,6600 r0 top
J16 "JDT1512PA00Z" JDT1512PA00Z#2 14300,4700 r0 bottom locked
J17 "JDT1512PA00Z" JDT1512PA00Z#2 700,2300 r180 bottom locked
J18 "JTSW12011TSRAM" JTSW12011TSRAM 10150,6765 r180 top locked
J19 "JDT1506PA00Z" "JDT1506PA00Z - 2 holes" 9800,520 r270 bottom locked
JP1 "RS/ERJ6GEYJ0R00VP" R0805 5100,650 r0 top
JP2 "RS/ERJ6GEYJ0R00VP" R0805 5100,750 r0 top
JP3 "RS/ERJ6GEYJ0R00VP" R0805 5780,650 r0 top
JP4 "RS/ERJ6GEYJ0R00VP" R0805 5780,745 r0 top
L1 "33uH 3A" IND/DO5022 8895,5300 r270 top
M1 "Mounting Hole 1/4\" Screw" MHole250 400,6600 r0 top locked
M2 "Mounting Hole 1/4\" Screw" MHole250 7500,6700 r0 top locked
M3 "Mounting Hole 1/4\" Screw" MHole250 14600,6600 r0 top locked
M4 "Mounting Hole 1/4\" Screw" MHole250 400,400 r0 top locked
M5 "Mounting Hole 1/4\" Screw" MHole250 7500,300 r0 top locked
M6 "Mounting Hole 1/4\" Screw" MHole250 14600,400 r0 top locked
Q1 "QS/VNB14NV04Z" D2PAK 12500,400 r270 top locked
Q2 "QS/VNB14NV04Z" D2PAK 11600,750 r270 top locked
Q3 "QS/VNB14NV04Z" D2PAK 12500,1100 r270 top locked
Q4 "QS/VNB14NV04Z" D2PAK 11600,1450 r270 top locked
Q5 "QS/VNB14NV04Z" D2PAK 12500,1800 r270 top locked
Q6 "QS/VNB14NV04Z" D2PAK 2500,6600 r90 top locked
Q7 "QS/VNB14NV04Z" D2PAK 3400,6250 r90 top locked
Q8 "QS/VNB14NV04Z" D2PAK 2500,5900 r90 top locked
Q9 "QS/VNB14NV04Z" D2PAK 3400,5550 r90 top locked
Q10 "QS/VNB14NV04Z" D2PAK 2500,5200 r90 top locked
Q11 "QS/VNB14NV04Z" D2PAK 12500,5200 r270 top locked
Q12 "QS/VNB14NV04Z" D2PAK 11600,5550 r270 top locked
Q13 "QS/VNB14NV04Z" D2PAK 12500,5900 r270 top locked
Q14 "QS/VNB14NV04Z" D2PAK 11600,6250 r270 top locked
Q15 "QS/VNB14NV04Z" D2PAK 12500,6600 r270 top locked
Q16 "QS/VNB14NV04Z" D2PAK 2500,1800 r90 top locked
Q17 "QS/VNB14NV04Z" D2PAK 3405,1450 r90 top locked
Q18 "QS/VNB14NV04Z" D2PAK 2500,1100 r90 top locked
Q19 "QS/VNB14NV04Z" D2PAK 3400,750 r90 top locked
Q20 "QS/VNB14NV04Z" D2PAK 2500,400 r90 top
Q21 "QS/VNB14NV04Z" D2PAK 8000,6450 r0 top
Q22 "BCX70K" SOT23 2750,4135 r0 top
Q23 "BCX70K" SOT23 4375,4135 r0 top
Q24 "BCX70K" SOT23 6000,4135 r0 top
Q25 "BCX70K" SOT23 9250,4135 r0 top
Q26 "BCX70K" SOT23 10875,4135 r0 top
Q27 "BCX70K" SOT23 12500,4135 r0 top
Q28 "BCX70K" SOT23 2920,4000 r0 top
Q29 "BCX70K" SOT23 4545,4000 r0 top
Q30 "BCX70K" SOT23 6170,4000 r0 top
Q31 "BCX70K" SOT23 9420,4000 r0 top
Q32 "BCX70K" SOT23 11045,4000 r0 top
Q33 "BCX70K" SOT23 12670,4000 r0 top
Q34 "BCX70K" SOT23 2730,2900 r0 top
Q35 "BCX70K" SOT23 4355,2900 r0 top
Q36 "BCX70K" SOT23 5980,2900 r0 top
Q37 "BCX70K" SOT23 9230,2900 r0 top
Q38 "BCX70K" SOT23 10855,2900 r0 top
Q39 "BCX70K" SOT23 12480,2900 r0 top
Q40 "BCX70K" SOT23 2550,2800 r180 top
Q41 "BCX70K" SOT23 4175,2800 r180 top
Q42 "BCX70K" SOT23 5800,2800 r180 top
Q43 "BCX70K" SOT23 9050,2800 r180 top
Q44 "BCX70K" SOT23 10675,2800 r180 top
Q45 "BCX70K" SOT23 12300,2800 r180 top
Q46 "BCX70K" SOT23 2370,2900 r0 top
Q47 "BCX70K" SOT23 3995,2900 r0 top
Q48 "BCX70K" SOT23 5620,2900 r0 top
Q49 "BCX70K" SOT23 8870,2900 r0 top
Q50 "BCX70K" SOT23 10495,2900 r0 top
Q51 "BCX70K" SOT23 12120,2900 r0 top
Q52 "BCX70K" SOT23 2560,4000 r0 top
Q53 "BCX70K" SOT23 4185,4000 r0 top
Q54 "BCX70K" SOT23 5810,4000 r0 top
Q55 "BCX70K" SOT23 9060,4000 r0 top
Q56 "BCX70K" SOT23 10685,4000 r0 top
Q57 "BCX70K" SOT23 12310,4000 r0 top
Q58 "BCX70K" SOT23 2740,3900 r180 top
Q59 "BCX70K" SOT23 4365,3900 r180 top
Q60 "BCX70K" SOT23 5990,3900 r180 top
Q61 "BCX70K" SOT23 9240,3900 r180 top
Q62 "BCX70K" SOT23 10865,3900 r180 top
Q63 "BCX70K" SOT23 12490,3900 r180 top
R1 "RS/ERJ6ENF1003VP" R0805 6265,4835 r0 top
R2 "RS/ERJ6ENF1003VP" R0805 4435,5365 r180 top
R3 "RS/ERJ6ENF1002VP" R0805 7015,6510 r180 top
R4 "RS/ERJ6ENF1003VP" R0805 4600,4835 r0 top
R5 "RS/ERJ8ENF1210VP" R1206 7130,800 r90 top
R6 "RS/ERJ6ENF2001VP" R0805 11000,400 r0 top
R7 "RS/ERJ6ENF2001VP" R0805 11000,850 r0 top
R8 "RS/ERJ6ENF2001VP" R0805 11000,1100 r0 top
R9 "RS/ERJ6ENF2001VP" R0805 11000,1550 r0 top
R10 "RS/ERJ6ENF2001VP" R0805 11000,1800 r0 top
R11 "RS/ERJ6ENF2001VP" R0805 3650,6600 r180 top
R12 "RS/ERJ6ENF2001VP" R0805 4000,6150 r180 top
R13 "RS/ERJ6ENF2001VP" R0805 4000,5900 r180 top
R14 "RS/ERJ6ENF2001VP" R0805 4000,5450 r180 top
R15 "RS/ERJ6ENF2001VP" R0805 4000,5200 r180 top
R16 "RS/ERJ6ENF1003VP" R0805 5100,4835 r0 top
R17 "RS/ERJ6ENF1002VP" R0805 10100,6000 r0 top
R18 "RS/ERJ6ENF1001VP" R0805 10050,5250 r0 top
R19 "RS/ERJ6ENF1002VP" R0805 7300,5900 r270 top
R20 "RS/ERJ6ENF1003VP" R0805 9550,6600 r90 top
R21 "RS/ERJ6ENF1003VP" R0805 9450,6600 r90 top
R22 "RS/ERJ6ENF1003VP" R0805 9350,6600 r90 top
R23 "RS/ERJ6ENF1003VP" R0805 9250,6600 r90 top
R24 "RS/ERJ6ENF1003VP" R0805 9150,6600 r90 top
R25 "RS/ERJ6ENF1003VP" R0805 9050,6600 r90 top
R26 "RS/ERJ6ENF1003VP" R0805 8950,6600 r90 top
R27 "RS/ERJ6ENF1003VP" R0805 8850,6600 r90 top
R28 "RS/ERJ6ENF1002VP" R0805 8840,280 r90 top
R29 "RS/ERJ6ENF5491VP" R0805 10215,5250 r0 top
R30 "RS/ERJ6ENF4750VP" R0805 9015,500 r270 top
R31 "RS/ERJ6ENF1003VP" R0805 5600,4835 r0 top
R32 "RS/ERJ6GEYJ0R00VP" R0805 7350,4850 r0 top
R33 "RS/ERJ6ENF2001VP" R0805 14550,775 r180 top
R34 "RS/ERJ6ENF1003VP" R0805 14550,875 r180 top
R35 "RS/ERJ6ENF2001VP" R0805 14550,1425 r180 top
R36 "RS/ERJ6ENF1003VP" R0805 14550,1525 r180 top
R37 "RS/ERJ6ENF2001VP" R0805 14550,1775 r180 top
R38 "RS/ERJ6ENF1003VP" R0805 14550,1875 r180 top
R39 "RS/ERJ6ENF2001VP" R0805 14550,2125 r180 top
R40 "RS/ERJ6ENF1003VP" R0805 14550,2225 r180 top
R41 "RS/ERJ6ENF2001VP" R0805 14550,2725 r180 top
R42 "RS/ERJ6ENF1003VP" R0805 14550,2825 r180 top
R43 "RS/ERJ6ENF2001VP" R0805 450,6220 r0 top
R44 "RS/ERJ6ENF1003VP" R0805 450,6120 r0 top
R45 "RS/ERJ6ENF2001VP" R0805 450,5570 r0 top
R46 "RS/ERJ6ENF1003VP" R0805 450,5470 r0 top
R47 "RS/ERJ6ENF2001VP" R0805 450,5220 r0 top
R48 "RS/ERJ6ENF1003VP" R0805 450,5120 r0 top
R49 "RS/ERJ6ENF2001VP" R0805 450,4870 r0 top
R50 "RS/ERJ6ENF1003VP" R0805 450,4770 r0 top
R51 "RS/ERJ6ENF2001VP" R0805 450,4270 r0 top
R52 "RS/ERJ6ENF1003VP" R0805 450,4170 r0 top
R53 "RS/ERJ6ENF3321VP" R0805 8100,430 r90 top
R54 "RS/ERJ6ENF4752VP" R0805 7825,300 r270 top
R55 "RS/ERJ6ENF1003VP" R0805 7400,5900 r270 top
R56 "RS/ERJ6ENF7501VP" R0805 8400,6147 r90 top
R57 "RS/ERJ6ENF2491VP" R0805 8250,6110 r0 top
R58 "RS/ERJ6ENF1003VP" R0805 6100,4835 r0 top
R59 "RS/ERJ6ENF2002VP" R0805 8100,600 r90 top
R60 "RS/ERJ6ENF1003VP" R0805 4930,650 r180 top
R61 "RS/ERJ6ENF1003VP" R0805 4930,750 r180 top
R62 "RS/ERJ6ENF2001VP" R0805 11735,5125 r0 top
R63 "RS/ERJ6ENF2001VP" R0805 11000,5650 r0 top
R64 "RS/ERJ6ENF2001VP" R0805 11000,5900 r0 top
R65 "RS/ERJ6ENF2001VP" R0805 11000,6350 r0 top
R66 "RS/ERJ6ENF2001VP" R0805 11900,6700 r0 top
R67 "33 Ohm 5 W" RES30.6-25.5X9 9000,6300 r180 top
R68 "RS/ERJ6ENF1003VP" R0805 5610,650 r180 top
R69 "RS/ERJ6ENF2001VP" R0805 4000,1800 r180 top
R70 "RS/ERJ6ENF2001VP" R0805 4000,1350 r180 top
R71 "RS/ERJ6ENF2001VP" R0805 4000,1100 r180 top
R72 "RS/ERJ6ENF2001VP" R0805 4000,650 r180 top
R73 "RS/ERJ6ENF2001VP" R0805 4000,400 r180 top
R74 "RS/ERJ6ENF1003VP" R0805 5610,745 r180 top
R75 "10K" P3299W 10100,6350 r90 top
R76 "RS/ERJ6ENF1003VP" R0805 9850,6600 r90 top
R77 "RS/ERJ6ENF1003VP" R0805 9750,6600 r90 top
R78 "RS/ERJ6ENF1003VP" R0805 9650,6600 r90 top
R79 "RS/ERJ6ENF1003VP" R0805 8750,6600 r90 top
R80 "RS/ERJ6ENF1003VP" R0805 8650,6600 r90 top
R81 "RS/ERJ6ENF1003VP" R0805 8550,6600 r90 top
R82 "RS/ERJ6ENF1002VP" R0805 6300,6200 r270 top
R83 "RS/ERJ6ENF2001VP" R0805 7900,5850 r90 top
R84 "RS/ERJ6ENF2001VP" R0805 14550,4050 r180 top
R85 "RS/ERJ6ENF1003VP" R0805 14550,4150 r180 top
R86 "RS/ERJ6ENF2001VP" R0805 14550,4700 r180 top
R87 "RS/ERJ6ENF1003VP" R0805 14550,4800 r180 top
R88 "RS/ERJ6ENF2001VP" R0805 14550,5050 r180 top
R89 "RS/ERJ6ENF1003VP" R0805 14550,5150 r180 top
R90 "RS/ERJ6ENF2001VP" R0805 14550,5400 r180 top
R91 "RS/ERJ6ENF1003VP" R0805 14550,5500 r180 top
R92 "RS/ERJ6ENF2001VP" R0805 14550,6000 r180 top
R93 "RS/ERJ6ENF1003VP" R0805 14550,6100 r180 top
R94 "RS/ERJ6ENF2001VP" R0805 450,2950 r0 top
R95 "RS/ERJ6ENF1003VP" R0805 450,2850 r0 top
R96 "RS/ERJ6ENF2001VP" R0805 450,2300 r0 top
R97 "RS/ERJ6ENF1003VP" R0805 450,2200 r0 top
R98 "RS/ERJ6ENF2001VP" R0805 450,1950 r0 top
R99 "RS/ERJ6ENF1003VP" R0805 450,1850 r0 top
R100 "RS/ERJ6ENF2001VP" R0805 450,1600 r0 top
R101 "RS/ERJ6ENF1003VP" R0805 450,1500 r0 top
R102 "RS/ERJ6ENF2001VP" R0805 450,950 r0 top
R103 "RS/ERJ6ENF1003VP" R0805 450,850 r0 top
R104 "RS/ERJ6ENF1003VP" R0805 7500,5900 r270 top
R105 "RS/ERJ6ENF4991VP" R0805 4500,1800 r90 top
R106 "RS/ERJ6ENF4991VP" R0805 5200,1800 r90 top
R107 "RS/ERJ6ENF4991VP" R0805 5900,1800 r90 top
R108 "RS/ERJ6ENF4991VP" R0805 8500,1800 r90 top
R109 "RS/ERJ6ENF4991VP" R0805 9200,1800 r90 top
R110 "RS/ERJ6ENF4991VP" R0805 9900,1800 r90 top
R111 "RS/ERJ8ENF1650VP" R1206 2670,4350 r180 top
R112 "RS/ERJ8ENF1650VP" R1206 4295,4350 r180 top
R113 "RS/ERJ8ENF1650VP" R1206 5920,4350 r180 top
R114 "RS/ERJ8ENF45R3VP" R1206 9170,4350 r180 top
R115 "RS/ERJ8ENF45R3VP" R1206 10795,4350 r180 top
R116 "RS/ERJ8ENF45R3VP" R1206 12420,4350 r180 top
R117 "RS/ERJ8ENF1650VP" R1206 2900,4350 r0 top
R118 "RS/ERJ8ENF1650VP" R1206 4525,4350 r0 top
R119 "RS/ERJ8ENF1650VP" R1206 6150,4350 r0 top
R120 "RS/ERJ8ENF45R3VP" R1206 9400,4350 r0 top
R121 "RS/ERJ8ENF45R3VP" R1206 11025,4350 r0 top
R122 "RS/ERJ8ENF45R3VP" R1206 12650,4350 r0 top
R123 "RS/ERJ6ENF4991VP" R0805 4600,1800 r90 top
R124 "RS/ERJ6ENF4991VP" R0805 5300,1800 r90 top
R125 "RS/ERJ6ENF4991VP" R0805 6000,1800 r90 top
R126 "RS/ERJ6ENF4991VP" R0805 8600,1800 r90 top
R127 "RS/ERJ6ENF4991VP" R0805 9300,1800 r90 top
R128 "RS/ERJ6ENF4991VP" R0805 10000,1800 r90 top
R129 "RS/ERJ8ENF1650VP" R1206 3100,4150 r90 top
R130 "RS/ERJ8ENF1650VP" R1206 4725,4150 r90 top
R131 "RS/ERJ8ENF1650VP" R1206 6350,4150 r90 top
R132 "RS/ERJ8ENF45R3VP" R1206 9600,4150 r90 top
R133 "RS/ERJ8ENF45R3VP" R1206 11225,4150 r90 top
R134 "RS/ERJ8ENF45R3VP" R1206 12850,4150 r90 top
R135 "RS/ERJ8ENF1650VP" R1206 3050,3850 r270 top
R136 "RS/ERJ8ENF1650VP" R1206 4675,3850 r270 top
R137 "RS/ERJ8ENF1650VP" R1206 6300,3850 r270 top
R138 "RS/ERJ8ENF45R3VP" R1206 9550,3850 r270 top
R139 "RS/ERJ8ENF45R3VP" R1206 11175,3850 r270 top
R140 "RS/ERJ8ENF45R3VP" R1206 12800,3850 r270 top
R141 "RS/ERJ6ENF4991VP" R0805 4700,1800 r90 top
R142 "RS/ERJ6ENF4991VP" R0805 5400,1800 r90 top
R143 "RS/ERJ6ENF4991VP" R0805 6100,1800 r90 top
R144 "RS/ERJ6ENF4991VP" R0805 8700,1800 r90 top
R145 "RS/ERJ6ENF4991VP" R0805 9400,1800 r90 top
R146 "RS/ERJ6ENF4991VP" R0805 10100,1800 r90 top
R147 "RS/ERJ8ENF1650VP" R1206 2900,3055 r90 top
R148 "RS/ERJ8ENF1650VP" R1206 4525,3055 r90 top
R149 "RS/ERJ8ENF1650VP" R1206 6150,3055 r90 top
R150 "RS/ERJ8ENF45R3VP" R1206 9400,3055 r90 top
R151 "RS/ERJ8ENF45R3VP" R1206 11025,3055 r90 top
R152 "RS/ERJ8ENF45R3VP" R1206 12650,3055 r90 top
R153 "RS/ERJ8ENF1650VP" R1206 2850,2745 r270 top
R154 "RS/ERJ8ENF1650VP" R1206 4475,2745 r270 top
R155 "RS/ERJ8ENF1650VP" R1206 6100,2745 r270 top
R156 "RS/ERJ8ENF45R3VP" R1206 9350,2745 r270 top
R157 "RS/ERJ8ENF45R3VP" R1206 10975,2745 r270 top
R158 "RS/ERJ8ENF45R3VP" R1206 12600,2745 r270 top
R159 "RS/ERJ6ENF4991VP" R0805 4800,1800 r90 top
R160 "RS/ERJ6ENF4991VP" R0805 5500,1800 r90 top
R161 "RS/ERJ6ENF4991VP" R0805 6200,1800 r90 top
R162 "RS/ERJ6ENF4991VP" R0805 8800,1800 r90 top
R163 "RS/ERJ6ENF4991VP" R0805 9500,1800 r90 top
R164 "RS/ERJ6ENF4991VP" R0805 10200,1800 r90 top
R165 "RS/ERJ8ENF1650VP" R1206 2605,2600 r0 top
R166 "RS/ERJ8ENF1650VP" R1206 4230,2600 r0 top
R167 "RS/ERJ8ENF1650VP" R1206 5855,2600 r0 top
R168 "RS/ERJ8ENF45R3VP" R1206 9105,2600 r0 top
R169 "RS/ERJ8ENF45R3VP" R1206 10730,2600 r0 top
R170 "RS/ERJ8ENF45R3VP" R1206 12355,2600 r0 top
R171 "RS/ERJ8ENF1650VP" R1206 2350,2600 r180 top
R172 "RS/ERJ8ENF1650VP" R1206 3975,2600 r180 top
R173 "RS/ERJ8ENF1650VP" R1206 5600,2600 r180 top
R174 "RS/ERJ8ENF45R3VP" R1206 8850,2600 r180 top
R175 "RS/ERJ8ENF45R3VP" R1206 10475,2600 r180 top
R176 "RS/ERJ8ENF45R3VP" R1206 12100,2600 r180 top
R177 "RS/ERJ6ENF4991VP" R0805 4900,1800 r90 top
R178 "RS/ERJ6ENF4991VP" R0805 5600,1800 r90 top
R179 "RS/ERJ6ENF4991VP" R0805 6300,1800 r90 top
R180 "RS/ERJ6ENF4991VP" R0805 8900,1800 r90 top
R181 "RS/ERJ6ENF4991VP" R0805 9600,1800 r90 top
R182 "RS/ERJ6ENF4991VP" R0805 10300,1800 r90 top
R183 "RS/ERJ8ENF1650VP" R1206 2205,2800 r270 top
R184 "RS/ERJ8ENF1650VP" R1206 3830,2800 r270 top
R185 "RS/ERJ8ENF1650VP" R1206 5455,2800 r270 top
R186 "RS/ERJ8ENF45R3VP" R1206 8705,2800 r270 top
R187 "RS/ERJ8ENF45R3VP" R1206 10330,2800 r270 top
R188 "RS/ERJ8ENF45R3VP" R1206 11955,2800 r270 top
R189 "RS/ERJ8ENF1650VP" R1206 2250,3100 r90 top
R190 "RS/ERJ8ENF1650VP" R1206 3875,3100 r90 top
R191 "RS/ERJ8ENF1650VP" R1206 5500,3100 r90 top
R192 "RS/ERJ8ENF45R3VP" R1206 8750,3100 r90 top
R193 "RS/ERJ8ENF45R3VP" R1206 10375,3100 r90 top
R194 "RS/ERJ8ENF45R3VP" R1206 12000,3100 r90 top
R195 "RS/ERJ6ENF4991VP" R0805 5000,1800 r90 top
R196 "RS/ERJ6ENF4991VP" R0805 5700,1800 r90 top
R197 "RS/ERJ6ENF4991VP" R0805 6400,1800 r90 top
R198 "RS/ERJ6ENF4991VP" R0805 9000,1800 r90 top
R199 "RS/ERJ6ENF4991VP" R0805 9700,1800 r90 top
R200 "RS/ERJ6ENF4991VP" R0805 10400,1800 r90 top
R201 "RS/ERJ8ENF1650VP" R1206 2350,3900 r270 top
R202 "RS/ERJ8ENF1650VP" R1206 3975,3900 r270 top
R203 "RS/ERJ8ENF1650VP" R1206 5600,3900 r270 top
R204 "RS/ERJ8ENF45R3VP" R1206 8850,3900 r270 top
R205 "RS/ERJ8ENF45R3VP" R1206 10475,3900 r270 top
R206 "RS/ERJ8ENF45R3VP" R1206 12100,3900 r270 top
R207 "RS/ERJ8ENF1650VP" R1206 2400,4200 r90 top
R208 "RS/ERJ8ENF1650VP" R1206 4025,4200 r90 top
R209 "RS/ERJ8ENF1650VP" R1206 5650,4200 r90 top
R210 "RS/ERJ8ENF45R3VP" R1206 8900,4200 r90 top
R211 "RS/ERJ8ENF45R3VP" R1206 10525,4200 r90 top
R212 "RS/ERJ8ENF45R3VP" R1206 12150,4200 r90 top
R213 "RS/ERJ6ENF4991VP" R0805 5100,1800 r90 top
R214 "RS/ERJ6ENF4991VP" R0805 5800,1800 r90 top
R215 "RS/ERJ6ENF4991VP" R0805 6500,1800 r90 top
R216 "RS/ERJ6ENF4991VP" R0805 9100,1800 r90 top
R217 "RS/ERJ6ENF4991VP" R0805 9800,1800 r90 top
R218 "RS/ERJ6ENF4991VP" R0805 10500,1800 r90 top
R219 "RS/ERJ8ENF1650VP" R1206 2550,3700 r180 top
R220 "RS/ERJ8ENF1650VP" R1206 4175,3700 r180 top
R221 "RS/ERJ8ENF1650VP" R1206 5800,3700 r180 top
R222 "RS/ERJ8ENF45R3VP" R1206 9050,3700 r180 top
R223 "RS/ERJ8ENF45R3VP" R1206 10675,3700 r180 top
R224 "RS/ERJ8ENF45R3VP" R1206 12300,3700 r180 top
R225 "RS/ERJ8ENF1650VP" R1206 2800,3700 r0 top
R226 "RS/ERJ8ENF1650VP" R1206 4425,3700 r0 top
R227 "RS/ERJ8ENF1650VP" R1206 6050,3700 r0 top
R228 "RS/ERJ8ENF45R3VP" R1206 9300,3700 r0 top
R229 "RS/ERJ8ENF45R3VP" R1206 10925,3700 r0 top
R230 "RS/ERJ8ENF45R3VP" R1206 12550,3700 r0 top
R231 "RS/ERJ6ENF1003VP" R0805 7035,2900 r270 top
R232 "RS/ERJ6ENF1001VP" R0805 9625,879 r0 top
R233 "RS/ERJ6ENF1001VP" R0805 10113,705 r0 top
R234 "RS/ERJ6ENF1001VP" R0805 10300,668 r90 top
U1 "IS/SN74HC573DWZ" SOIC300-20 7400,4100 r0 top
U2 "M25P64-VMF6G" SO16W 4600,5100 r270 top
U3 "dsPIC30F6014A-30I/PT" TQFP-80 7195,5300 r270 top
U4 "IS/CS4344CZZZ" TSSOP\10 8800,800 r180 top
U5 "CAN Transceiver" "SOIC 8" 6900,800 r270 top
U6 "M25P64-VMF6G" SO16W 5100,5100 r270 top
U7 "IS/LM2676SADJN" TO263\7 10000,5700 r0 top
U8 "LP2950CDT-3.3" "D-PAK / TO-252AA" 5265,5935 r0 top
U9 "M25P64-VMF6G" SO16W 5600,5100 r270 top
U10 "IS/SN74HC541DWZ" SOIC300-20 7400,1700 r0 top
U11 "LM4861M" "soic 8" 7900,600 r0 top
U12 "LP2950CDT-5.0" "D-PAK / TO-252AA" 13550,3735 r0 top
U13 "M25P64-VMF6G" SO16W 6100,5100 r270 top
U14 "IS/SN74HC573DWZ" SOIC300-20 7400,2400 r0 top
U15 "IS/MAX3221IDBRT" SSOP16 4600,6000 r0 top
U16 "CP2102-GM" QFN28 6045,6195 r0 top
U17 "Voltage Converter" "SOIC 8" 10650,6500 r0 top
U18 "IS/SN74HC541DWZ" SOIC300-20 7400,3400 r0 top
U19 "IS/SN74HC573DWZ" SOIC300-20 4850,1400 r0 top
U20 "IS/SN74HC573DWZ" SOIC300-20 5550,1400 r0 top
U21 "IS/SN74HC573DWZ" SOIC300-20 6250,1400 r0 top
U22 "IS/SN74HC573DWZ" SOIC300-20 8850,1400 r0 top
U23 "IS/SN74HC573DWZ" SOIC300-20 9550,1400 r0 top
U24 "IS/SN74HC573DWZ" SOIC300-20 10250,1400 r0 top
U25 "IS/SN74HC138DZ" "SOIC 16" 7400,2900 r0 top
U26 "I#S/DS1306EN+Z" TSSOP-20 7450,1175 r0 top
Y1 "12.288MHz" XTSL\CSM-7 7250,4600 r0 top
Y2 "32.768KHz" ZS/MC306 7350,950 r0 top

## Footprints (in the part's own frame and the unit in brackets; to place one, negate y for a bottom-side part, rotate by r counter-clockwise, add the part's x,y. Pads: shape width x height; smd on the part's side, far side on the other; paste and mask are expansions set on the pad)
C4X5.8 [mil]
  rect 50x110 smd: 1(0,70) 2(0,-70)
  silkscreen extent -95,-95 95,95
C0805 [mil]
  rect 50x55 smd: 1(-37,0) 2(37,0)
  silkscreen extent -75,-40 75,40
C7343 [mil]
  rect 100x100 smd: 1(-125,0) 2(125,0)
  silkscreen extent -200,-90 190,90
"C EIA7343-43 (X)" [mm] "Capacitor, SM Tantalum; Body 7.3 x 4.3 mm (LxW typ)"
  rect 2.6x2.4 smd: 1(-3.2,0) 2(3.2,0)
  silkscreen extent -4.58,-2.3 3.8,2.42
D2PAK [mil]
  rect 80x160 smd: 1(-100,-375) 3(100,-375)
  rect 450x450 smd: 2(0,0)
  silkscreen extent -240,-275 240,240
"D-PAK / TO-252AA" [mm] "D-PAK/TO-252-AA; 3 Leads (1 Cropped); Body 10.4 (inc. leads) x 6.7 mm (LxW max)"
  rect 1x1.6 smd: 1(-2.285,-3.425) 3(2.285,-3.425)
  rect 5.5x7.1 smd: 2(0,3.425)
  silkscreen extent -3.09,-4.13 3.09,6.88
DIODE_SMC [mm] "Diode"
  rect 2x3.2 smd: A(-3.305,0) K(3.305,0)
  silkscreen extent -3.55,-3.11 3.55,3.11
DSUBV9 [mil] "D-Sub Vertical Connector, 9 pin"
  rect 70x70 hole 45: 1(-218,-56)
  round 70 hole 45: 2(-109,-56) 3(0,-56) 4(109,-56) 5(218,-56) 6(-163.5,56) 7(-54.5,56) 8(54.5,56) 9(163.5,56)
  round 150 hole 120: 10(-492.01,0) 11(492.01,0)
  silkscreen extent -606,-247 606,247
FIDUCIAL#1 [mil]
  round 50 smd: 1(0,0)
  silkscreen extent -50,-50 50,50
FIDUCIAL#2 [mil]
  round 50 smd mask+20: 1(0,0)
  silkscreen extent -50,-50 50,50
IND/DO5022 [mil]
  rect 115x110 smd: 1(-302.5,0) 2(302.5,0)
  silkscreen extent -365,-300 365,300
JCPM5086VE0Z [mil] "ASI term strip header 6P 5.08mm Vert"
  rect 100x100 / inner round 100 / far side rect 100x100 hole 62: 1(0,0)
  round 100 hole 62: 2(200,0) 3(400,0) 4(600,0) 5(800,0) 6(1000,0)
  silkscreen extent -115,-150 1115,180
"JDT1506PA00Z - 2 holes" [mil] "Deutsch 6P with 2 holes removed"
  round 125 hole 125 unplated: 0(240,-603) 0(240,253)
  rect 160x125 hole 80: 1(0,0)
  oval 160x125 hole 80: 2(0,-175) 3(0,-350) 4(-359,-350) 5(-359,-175) 6(-359,0)
  silkscreen extent -874,-907 514,778
JDT1512PA00Z#1 [mil]
  round 125 hole 125 unplated: 0(-600,-1128) 0(240,-1128) 0(240,253)
  round 125 hole 156 unplated: 0(-600,253)
  rect 160x125 hole 80: 1(0,0)
  oval 160x125 hole 80: 2(0,-175) 3(0,-350) 4(0,-525) 5(0,-700) 6(0,-875) 7(-359,-875) 8(-359,-700) 9(-359,-525) 10(-359,-350) 11(-359,-175) 12(-359,0)
  silkscreen extent -874,-1603 514,728
JDT1512PA00Z#2 [mil]
  round 125 hole 125 unplated: 0(-600,-1128) 0(-600,253) 0(240,-1128) 0(240,253)
  rect 160x125 hole 80: 1(0,0)
  oval 160x125 hole 80: 2(0,-175) 3(0,-350) 4(0,-525) 5(0,-700) 6(0,-875) 7(-359,-875) 8(-359,-700) 9(-359,-525) 10(-359,-350) 11(-359,-175) 12(-359,0)
  silkscreen extent -874,-1603 514,728
JTSW12011TSRAM [mil]
  rect 70x70 / inner round 70 / far side rect 70x70 hole 40: 1(0,0)
  round 70 hole 40: 2(100,0) 3(200,0) 4(300,0) 5(400,0) 6(500,0) 7(600,0) 8(700,0) 9(800,0) 10(900,0) 11(1000,0) 12(1100,0) 13(1200,0) 14(1300,0) 15(1400,0) 16(1500,0) 17(1600,0) 18(1700,0) 19(1800,0) 20(1900,0)
  silkscreen extent -40,-200 1930,-50
KUSBVX-BS1N [mm] "USB Type B PCB"
  round 3.8 hole 2.3: 0(-6.02,-0.85) 0(6.02,-0.85)
  rect 1.651x1.651 hole 1.016: 1(1.25,1.85)
  round 1.651 hole 1.016: 2(-1.25,1.85) 3(-1.25,-1.35) 4(1.25,-1.35)
  silkscreen extent -6.02,-5.65 6.02,5.65
"LED T1-3/4 Flush" [mil]
  round 70 hole 45: 1(0,0) 2(100,0)
  silkscreen extent -65,-115 155,115
MHole250 [mil]
  round 0 hole 390 unplated: 0(0,0)
  Keep-Out Layer circle w7.87: c0,0 r188
  silkscreen extent -188,-188 188,188
P3299W [mil]
  round 60 hole 32: 1(0,0) 2(100,0) 3(200,0)
  silkscreen extent -90,-80 290,170
QFN28 [mm] "Quad Flat No Lead, Plastic"
  rect 3.35x3.35 smd: 0(0,0)
  rect 0.3x0.6 smd mask+0.051: 1(-1.5,-2.3) 2(-1,-2.3) 3(-0.5,-2.3) 4(0,-2.3) 5(0.5,-2.3) 6(1,-2.3) 7(1.5,-2.3) 15(1.5,2.3) 16(1,2.3) 17(0.5,2.3) 18(0,2.3) 19(-0.5,2.3) 20(-1,2.3) 21(-1.5,2.3)
  rect 0.6x0.3 smd mask+0.051: 8(2.3,-1.5) 9(2.3,-1) 10(2.3,-0.5) 11(2.3,0) 12(2.3,0.5) 13(2.3,1) 14(2.3,1.5) 22(-2.3,1.4) 23(-2.3,0.9) 24(-2.3,0.4) 25(-2.3,-0.1) 26(-2.3,-0.6) 27(-2.3,-1.1) 28(-2.3,-1.6)
  silkscreen extent -2.7,-3.22 2.7,2.7
R0805 [mil]
  rect 50x55 smd: 1(-37,0) 2(37,0)
  silkscreen extent -75,-40 75,40
R1206 [mil]
  rect 55x65 smd: 1(-55,0) 2(55,0)
  silkscreen extent -95,-45 95,45
RES30.6-25.5X9 [mm] "Resistor, Axial; Body 25.5 x 9 mm (LxDia. max), Lead Dia. 0.85 mm (max)"
  round 2 hole 1.2: 1(-15.3,0) 2(15.3,0)
  silkscreen extent -12.75,-4.5 12.75,4.5
SO16W [mm] "Small Outline; 16 Leads; Body Width 7.5 mm; Pitch 1.27 mm"
  rect 0.6x2.25 smd: 1(-4.445,-4.575) 2(-3.175,-4.575) 3(-1.905,-4.575) 4(-0.635,-4.575) 5(0.635,-4.575) 6(1.905,-4.575) 7(3.175,-4.575) 8(4.445,-4.575) 9(4.445,4.575) 10(3.175,4.575) 11(1.905,4.575) 12(0.635,4.575) 13(-0.635,4.575) 14(-1.905,4.575) 15(-3.175,4.575) 16(-4.445,4.575)
  silkscreen extent -5.3,-4.7 5.27,3.05
SOD123 [mm]
  rect 1.6x0.8 smd: 1(-1.7,0) 2(1.7,0)
  silkscreen extent -1.95,-1.4 1.95,1.4
SOIC300-20 [mm] "Small Outline, Plastic, Wide; 20 Leads; Body Width 7.5 mm; Pitch 1.27 mm"
  rect 0.6x2.2 smd: 1(-5.715,-4.6) 2(-4.445,-4.6) 3(-3.175,-4.6) 4(-1.905,-4.6) 5(-0.635,-4.6) 6(0.635,-4.6) 7(1.905,-4.6) 8(3.175,-4.6) 9(4.445,-4.6) 10(5.715,-4.6) 11(5.715,4.6) 12(4.445,4.6) 13(3.175,4.6) 14(1.905,4.6) 15(0.635,4.6) 16(-0.635,4.6) 17(-1.905,4.6) 18(-3.175,4.6) 19(-4.445,4.6) 20(-5.715,4.6)
  silkscreen extent -6.69,-4.72 6.53,3.1
"SOIC 8" [mm] "Small Outline; 8 Leads; Body Width 3.9 mm; Pitch 1.27 mm"
  rect 0.6x2.05 smd: 1(-1.905,-2.675) 2(-0.635,-2.675) 3(0.635,-2.675) 4(1.905,-2.675) 5(1.905,2.675) 6(0.635,2.675) 7(-0.635,2.675) 8(-1.905,2.675)
  silkscreen extent -2.88,-2.8 2.5,1.25
"soic 8" [mm] "Small Outline; 8 Leads; Body Width 3.9 mm; Pitch 1.27 mm"
  rect 0.6x2.05 smd: 1(-1.905,-2.675) 2(-0.635,-2.675) 3(0.635,-2.675) 4(1.905,-2.675) 5(1.905,2.675) 6(0.635,2.675) 7(-0.635,2.675) 8(-1.905,2.675)
  silkscreen extent -2.88,-2.8 2.5,1.25
"SOIC 16" [mm] "Small Outline; 16 Leads; Body Width 3.9 mm; Pitch 1.27 mm"
  rect 0.6x2.05 smd: 1(-4.445,-2.675) 2(-3.175,-2.675) 3(-1.905,-2.675) 4(-0.635,-2.675) 5(0.635,-2.675) 6(1.905,-2.675) 7(3.175,-2.675) 8(4.445,-2.675) 9(4.445,2.675) 10(3.175,2.675) 11(1.905,2.675) 12(0.635,2.675) 13(-0.635,2.675) 14(-1.905,2.675) 15(-3.175,2.675) 16(-4.445,2.675)
  silkscreen extent -5.42,-2.8 5,1.25
SOT23 [mm] "SOT-23; 3 Leads; Body 3.1 x 2.5 mm, inc. leads (LxW max), Alternate Lead Configuration"
  rect 0.9x0.95 smd: 1(-0.95,-1.175) 2(0.95,-1.175) 3(0,1.175)
  silkscreen extent -2.05,-1.3 1.3,1.18
SSOP16 [mm]
  rect 0.4x2.15 smd: 1(-2.275,-3.275) 2(-1.625,-3.275) 3(-0.975,-3.275) 4(-0.325,-3.275) 5(0.325,-3.275) 6(0.975,-3.275) 7(1.625,-3.275) 8(2.275,-3.275) 9(2.275,3.275) 10(1.625,3.275) 11(0.975,3.275) 12(0.325,3.275) 13(-0.325,3.275) 14(-0.975,3.275) 15(-1.625,3.275) 16(-2.275,3.275)
  silkscreen extent -3.25,-3.4 3.25,1.8
TO263\7 [mil]
  rect 36x85 smd: 1(-150,-328) 2(-100,-328) 3(-50,-328) 4(0,-328) 5(50,-328) 6(100,-328) 7(150,-328)
  rect 425x410 smd: 8(0,0)
  silkscreen extent -230,-225 230,225
TQFP-80 [mm] "QFP, Plastic, Thin; 80 Leads; Body 12 x 12 mm; Pitch 0.5 mm; Lead Form 1.0/0.1 mm"
  rect 1.6x0.3 smd: 1(-6.6,4.75) 2(-6.6,4.25) 3(-6.6,3.75) 4(-6.6,3.25) 5(-6.6,2.75) 6(-6.6,2.25) 7(-6.6,1.75) 8(-6.6,1.25) 9(-6.6,0.75) 10(-6.6,0.25) 11(-6.6,-0.25) 12(-6.6,-0.75) 13(-6.6,-1.25) 14(-6.6,-1.75) 15(-6.6,-2.25) 16(-6.6,-2.75) 17(-6.6,-3.25) 18(-6.6,-3.75) 19(-6.6,-4.25) 20(-6.6,-4.75) 41(6.6,-4.75) 42(6.6,-4.25) 43(6.6,-3.75) 44(6.6,-3.25) 45(6.6,-2.75) 46(6.6,-2.25) 47(6.6,-1.75) 48(6.6,-1.25) 49(6.6,-0.75) 50(6.6,-0.25) 51(6.6,0.25) 52(6.6,0.75) 53(6.6,1.25) 54(6.6,1.75) 55(6.6,2.25) 56(6.6,2.75) 57(6.6,3.25) 58(6.6,3.75) 59(6.6,4.25) 60(6.6,4.75)
  rect 0.3x1.6 smd: 21(-4.75,-6.6) 22(-4.25,-6.6) 23(-3.75,-6.6) 24(-3.25,-6.6) 25(-2.75,-6.6) 26(-2.25,-6.6) 27(-1.75,-6.6) 28(-1.25,-6.6) 29(-0.75,-6.6) 30(-0.25,-6.6) 31(0.25,-6.6) 32(0.75,-6.6) 33(1.25,-6.6) 34(1.75,-6.6) 35(2.25,-6.6) 36(2.75,-6.6) 37(3.25,-6.6) 38(3.75,-6.6) 39(4.25,-6.6) 40(4.75,-6.6) 61(4.75,6.6) 62(4.25,6.6) 63(3.75,6.6) 64(3.25,6.6) 65(2.75,6.6) 66(2.25,6.6) 67(1.75,6.6) 68(1.25,6.6) 69(0.75,6.6) 70(0.25,6.6) 71(-0.25,6.6) 72(-0.75,6.6) 73(-1.25,6.6) 74(-1.75,6.6) 75(-2.25,6.6) 76(-2.75,6.6) 77(-3.25,6.6) 78(-3.75,6.6) 79(-4.25,6.6) 80(-4.75,6.6)
  silkscreen extent -6.72,-5.4 5.4,5.58
TSSOP-20 [mm] "Shrink Small Outline; 20 Leads; Body Width 4.4 mm; Pitch 0.65 mm"
  rect 0.3x1.6 smd: 1(-2.925,-2.85) 2(-2.275,-2.85) 3(-1.625,-2.85) 4(-0.975,-2.85) 5(-0.325,-2.85) 6(0.325,-2.85) 7(0.975,-2.85) 8(1.625,-2.85) 9(2.275,-2.85) 10(2.925,-2.85) 11(2.925,2.85) 12(2.275,2.85) 13(1.625,2.85) 14(0.975,2.85) 15(0.325,2.85) 16(-0.325,2.85) 17(-0.975,2.85) 18(-1.625,2.85) 19(-2.275,2.85) 20(-2.925,2.85)
  silkscreen extent -3.75,-2.97 3.3,1.65
TSSOP\10 [mm] "T Shrink Small Outline; 10 Leads; Body Width 3 mm; Pitch 0.5 mm"
  rect 0.3x1.6 smd: 1(-1,-2.05) 2(-0.5,-2.05) 3(0,-2.05) 4(0.5,-2.05) 5(1,-2.05) 6(1,2.05) 7(0.5,2.05) 8(0,2.05) 9(-0.5,2.05) 10(-1,2.05)
  silkscreen extent -1.83,-2.17 1.58,0.85
WIRE_14GA [mil] "Hole for 14GA stranded wire"
  round 140 hole 90: 1(0,0)
  silkscreen extent -80,-80 80,80
XTSL\CSM-7 [mil]
  rect 200x100 smd: 1(-145,0) 2(145,0)
  silkscreen extent -260,-95 260,95
ZS/MC306 [mm]
  round 0.8 on Top Overlay: 0(-1.981,0.889)
  rect 1.9x1.3 smd: 1(0,0) 2(0,-5.5) 3(3.2,-5.5) 4(3.2,0)
  silkscreen extent -1.3,-6.55 4.47,1.02